# Altium PCB 20bit_40MS_ADC_DIOT.PcbDoc (part 1 of 8)
Units mm, origin at the board's own origin, x right, y up, seen from the top; angles counter-clockwise.
Board outline 222.63 x 100.1 mm, 6 copper layers (L1, L2, L3, L4, L5, L6), stack 2.522 mm thick; 616 components, 374 nets, 2097 pads, 984 vias.
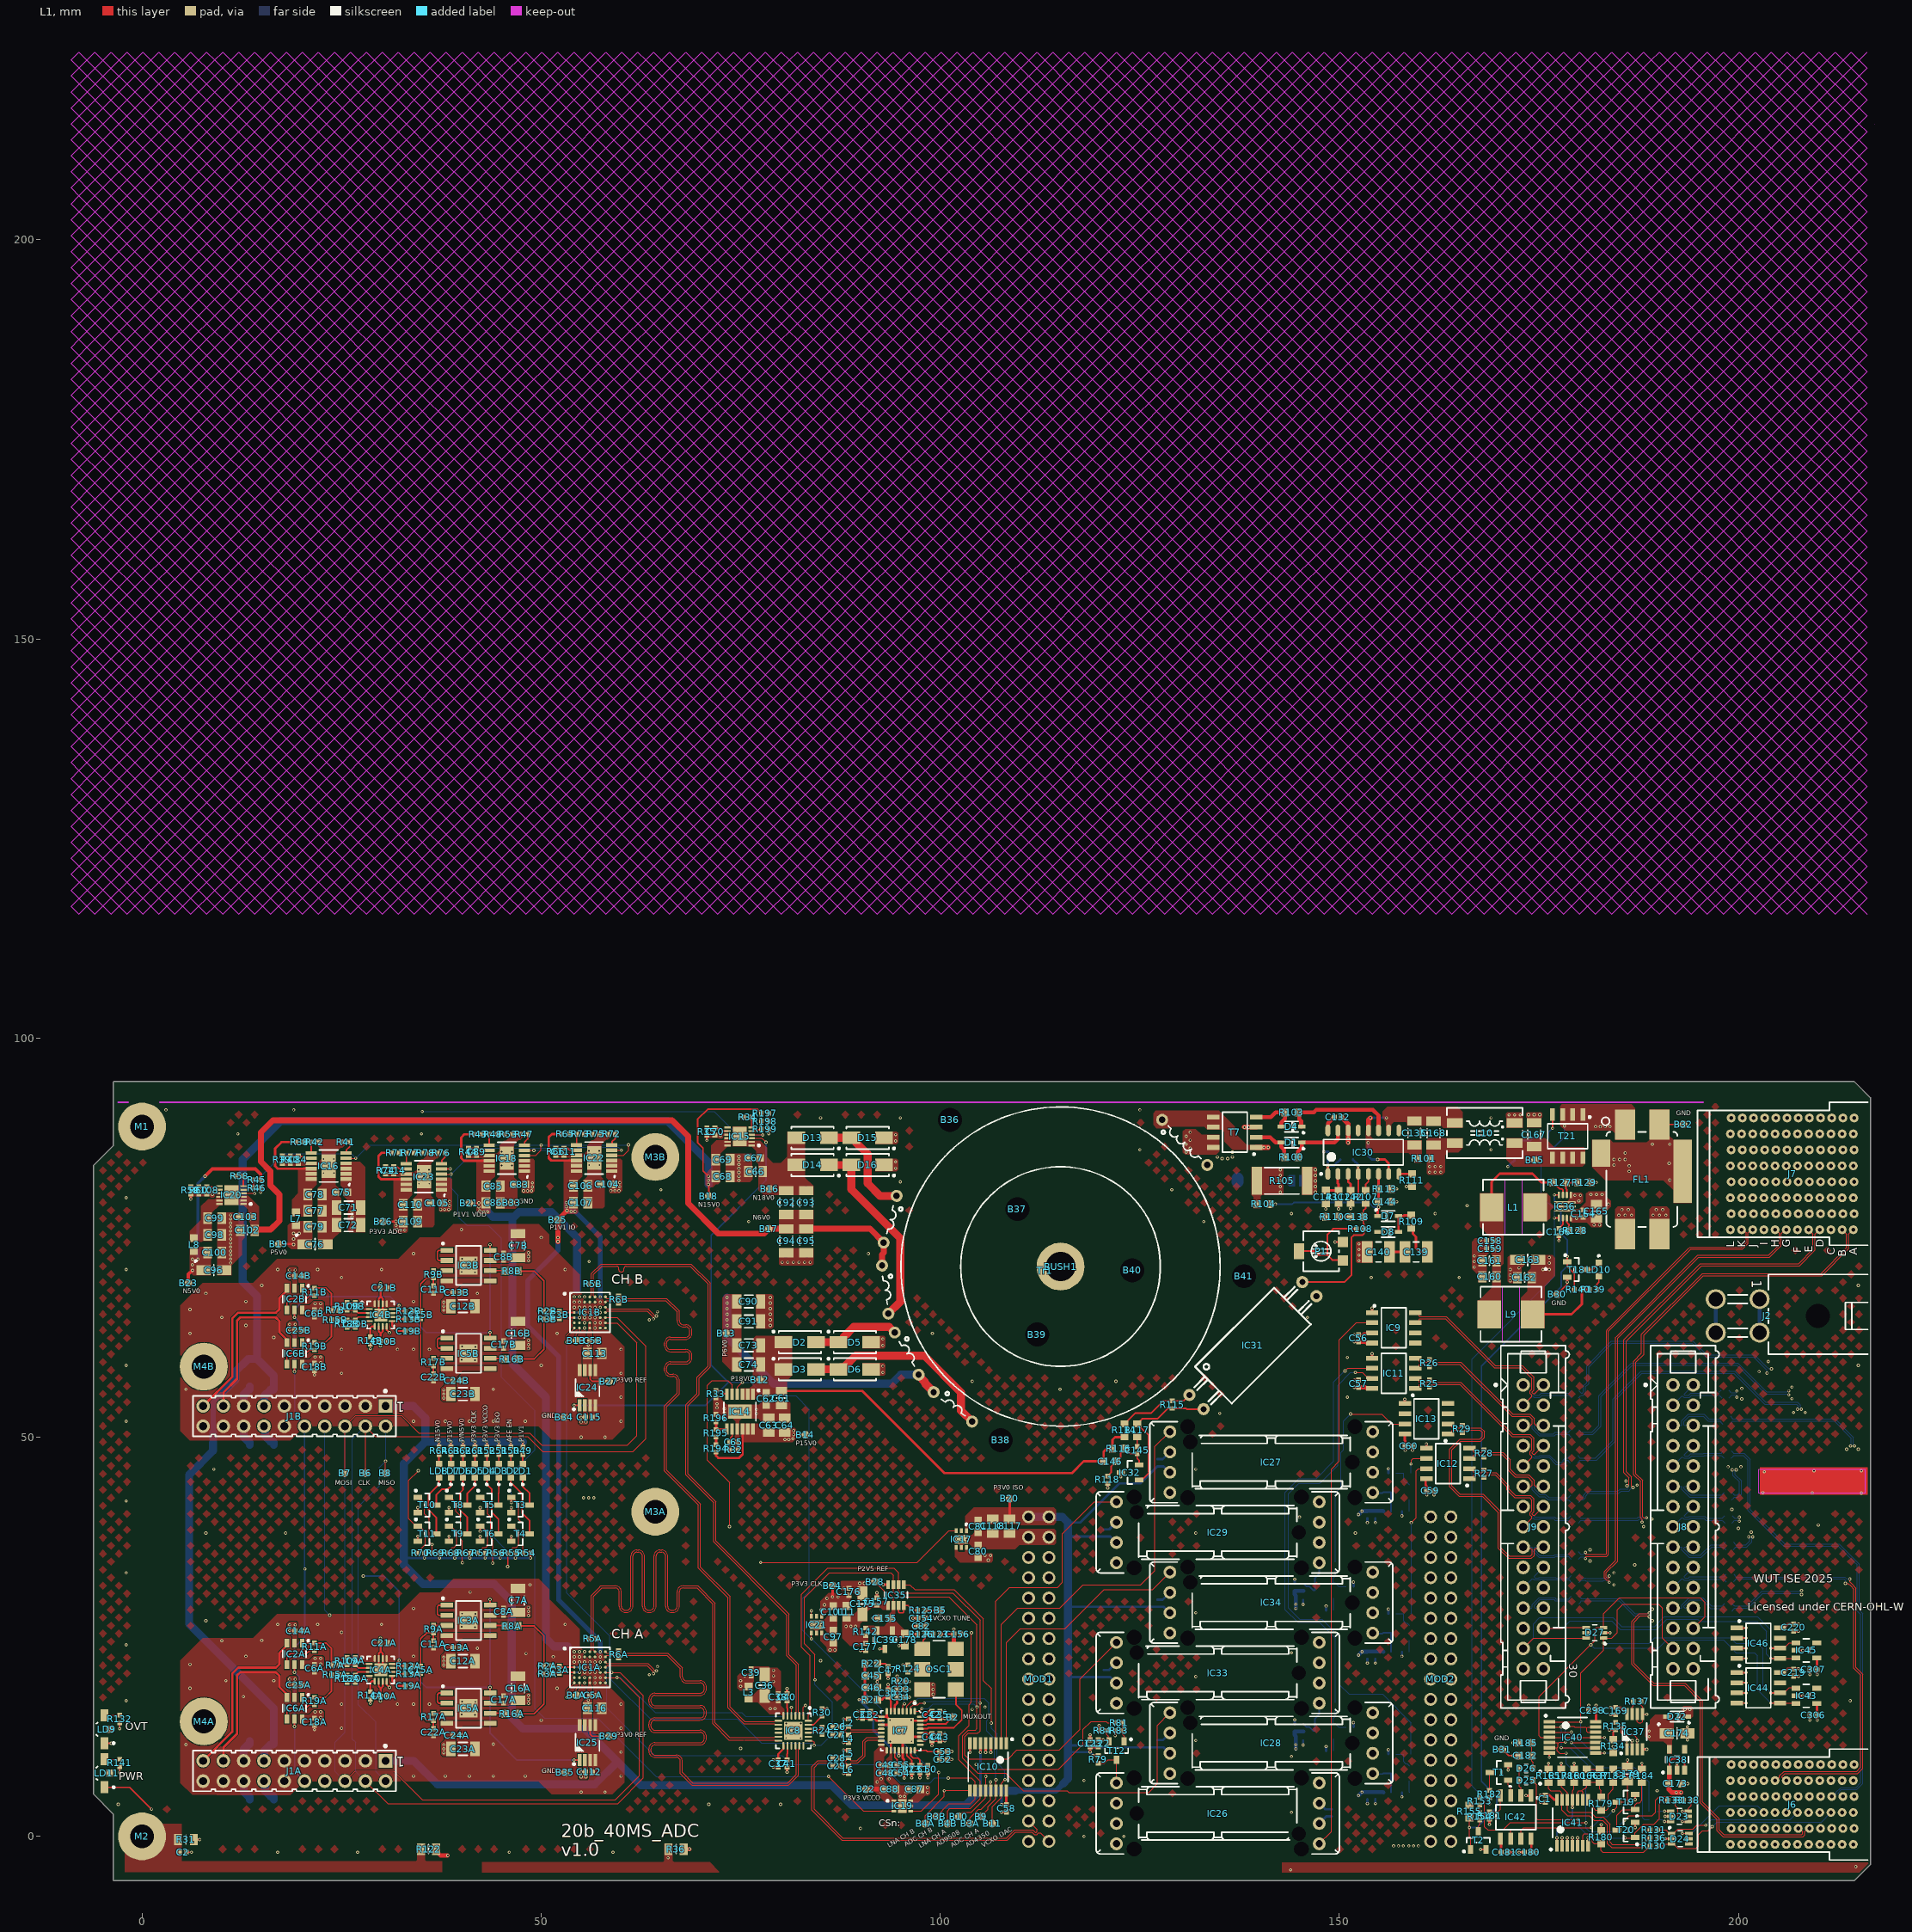
[diagram p0: L1 view]
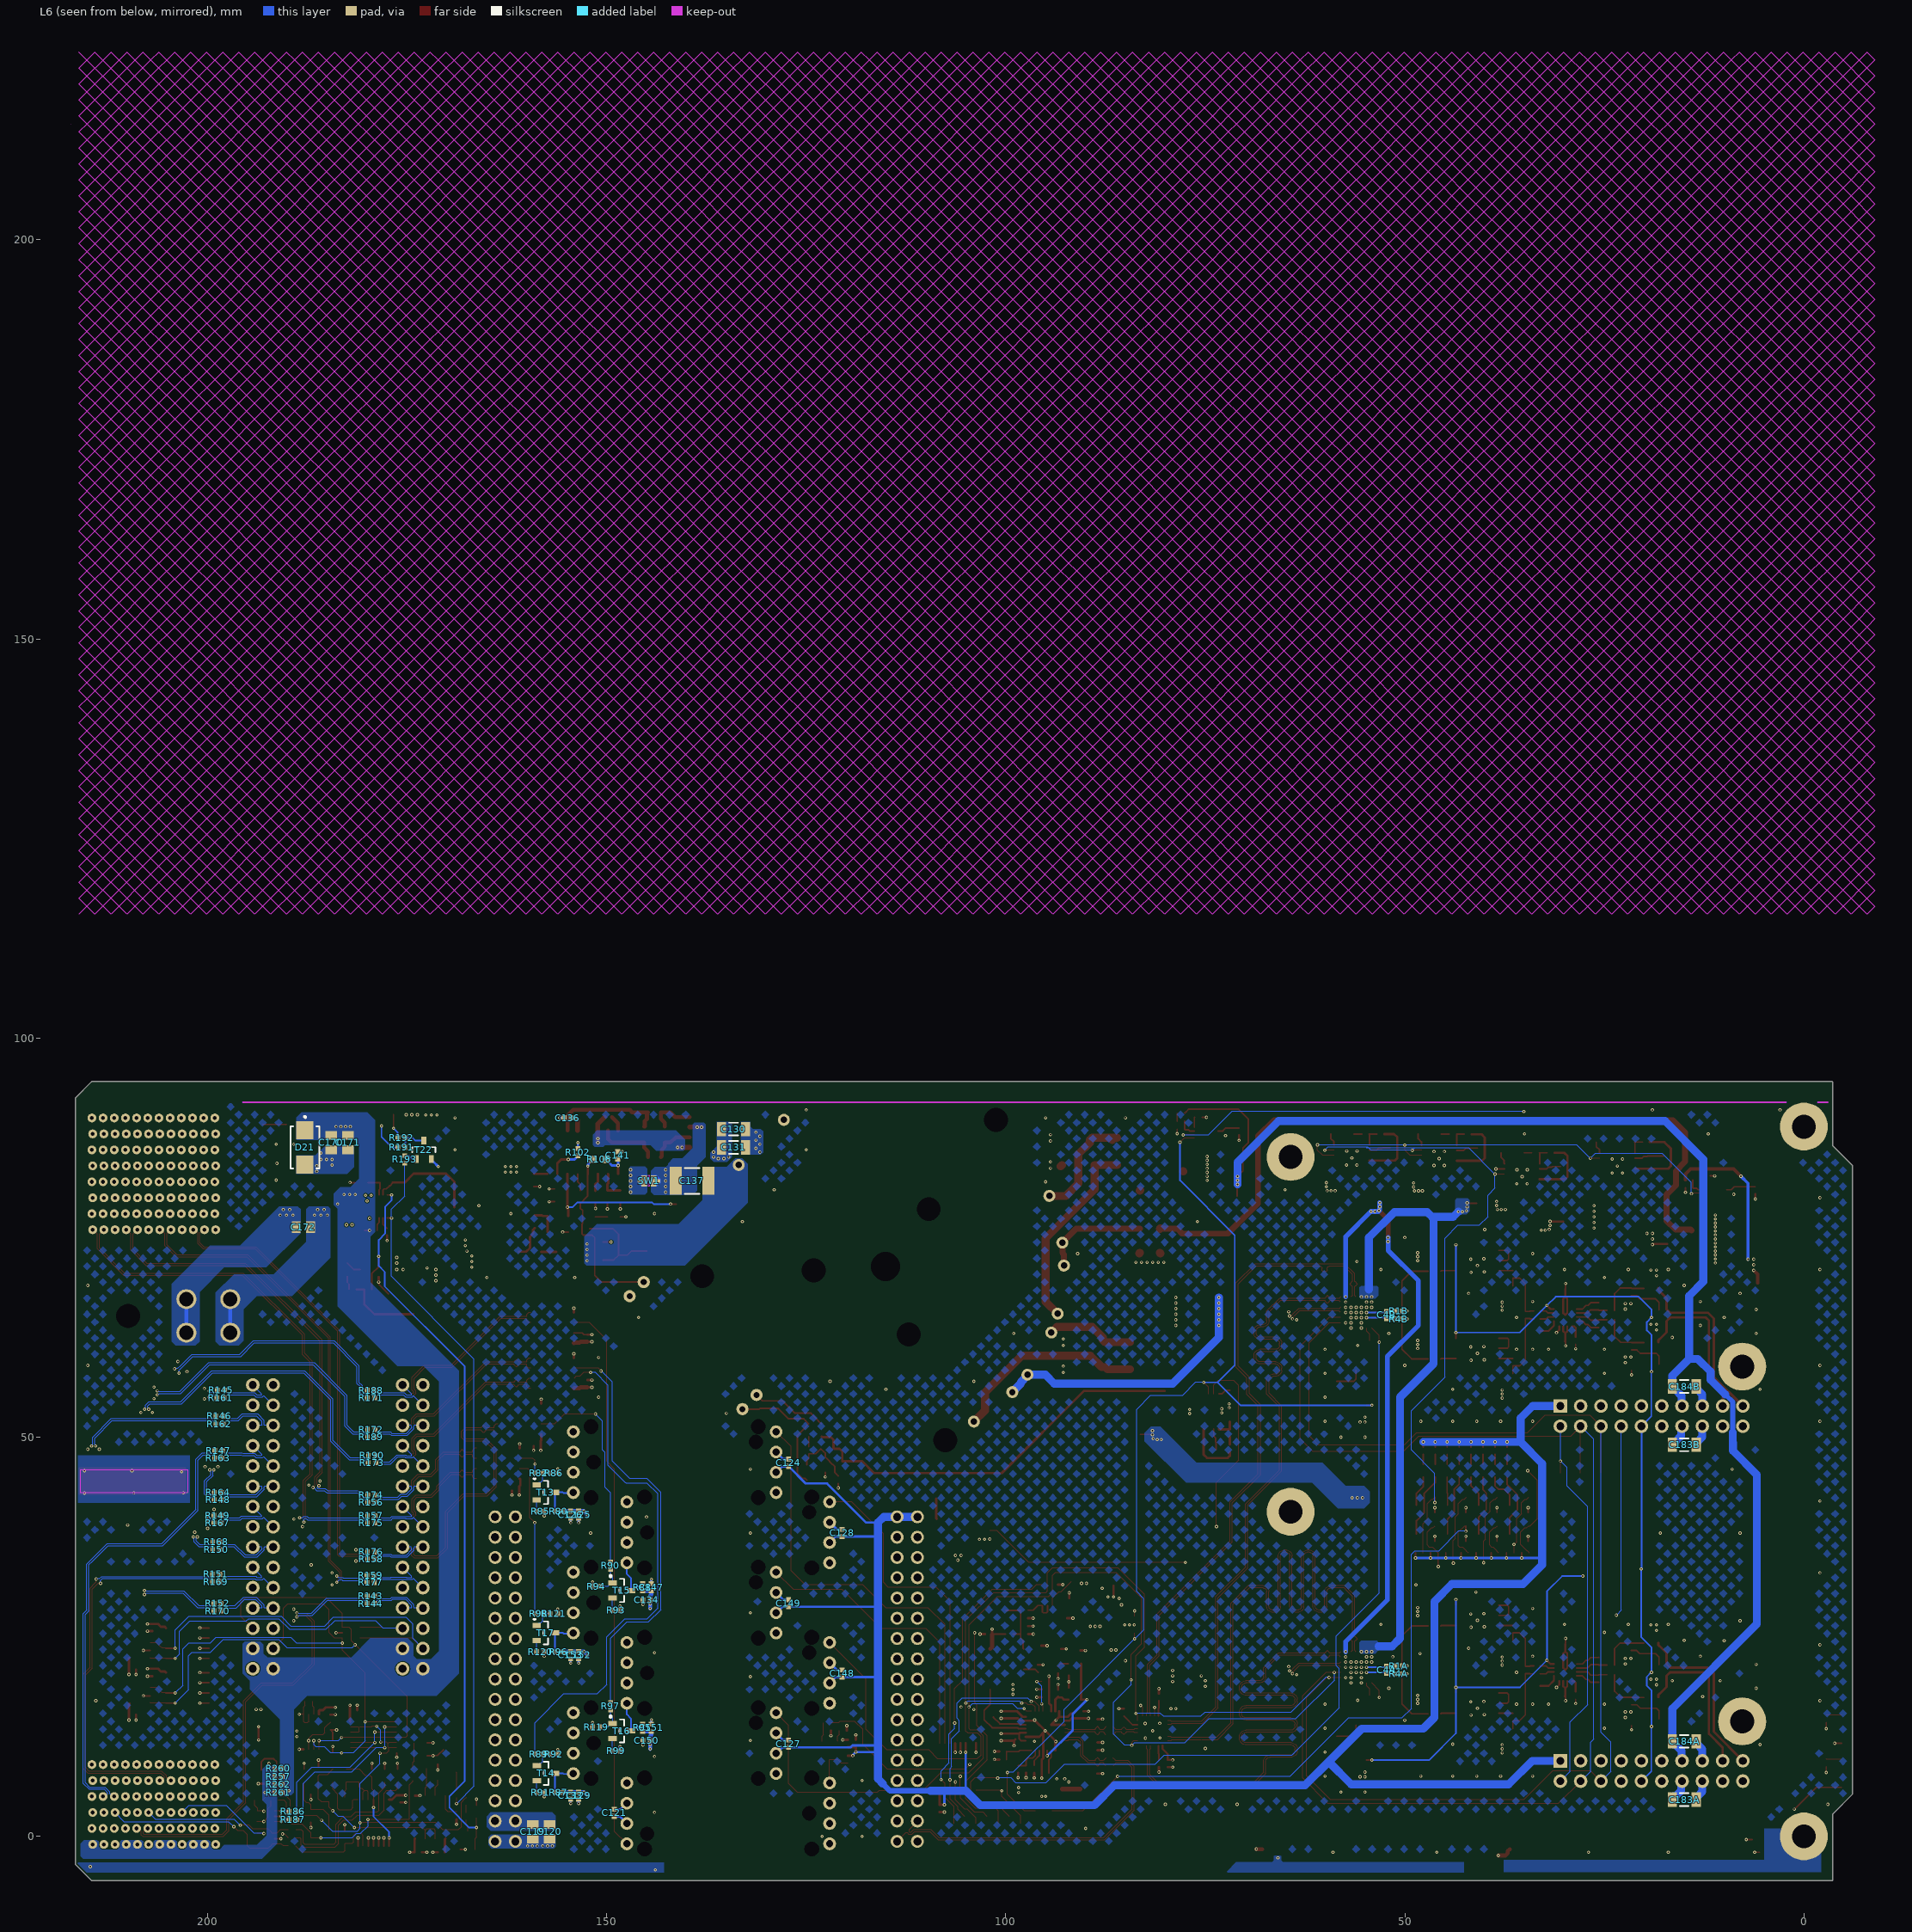
[diagram p1: L6 view, seen from below]
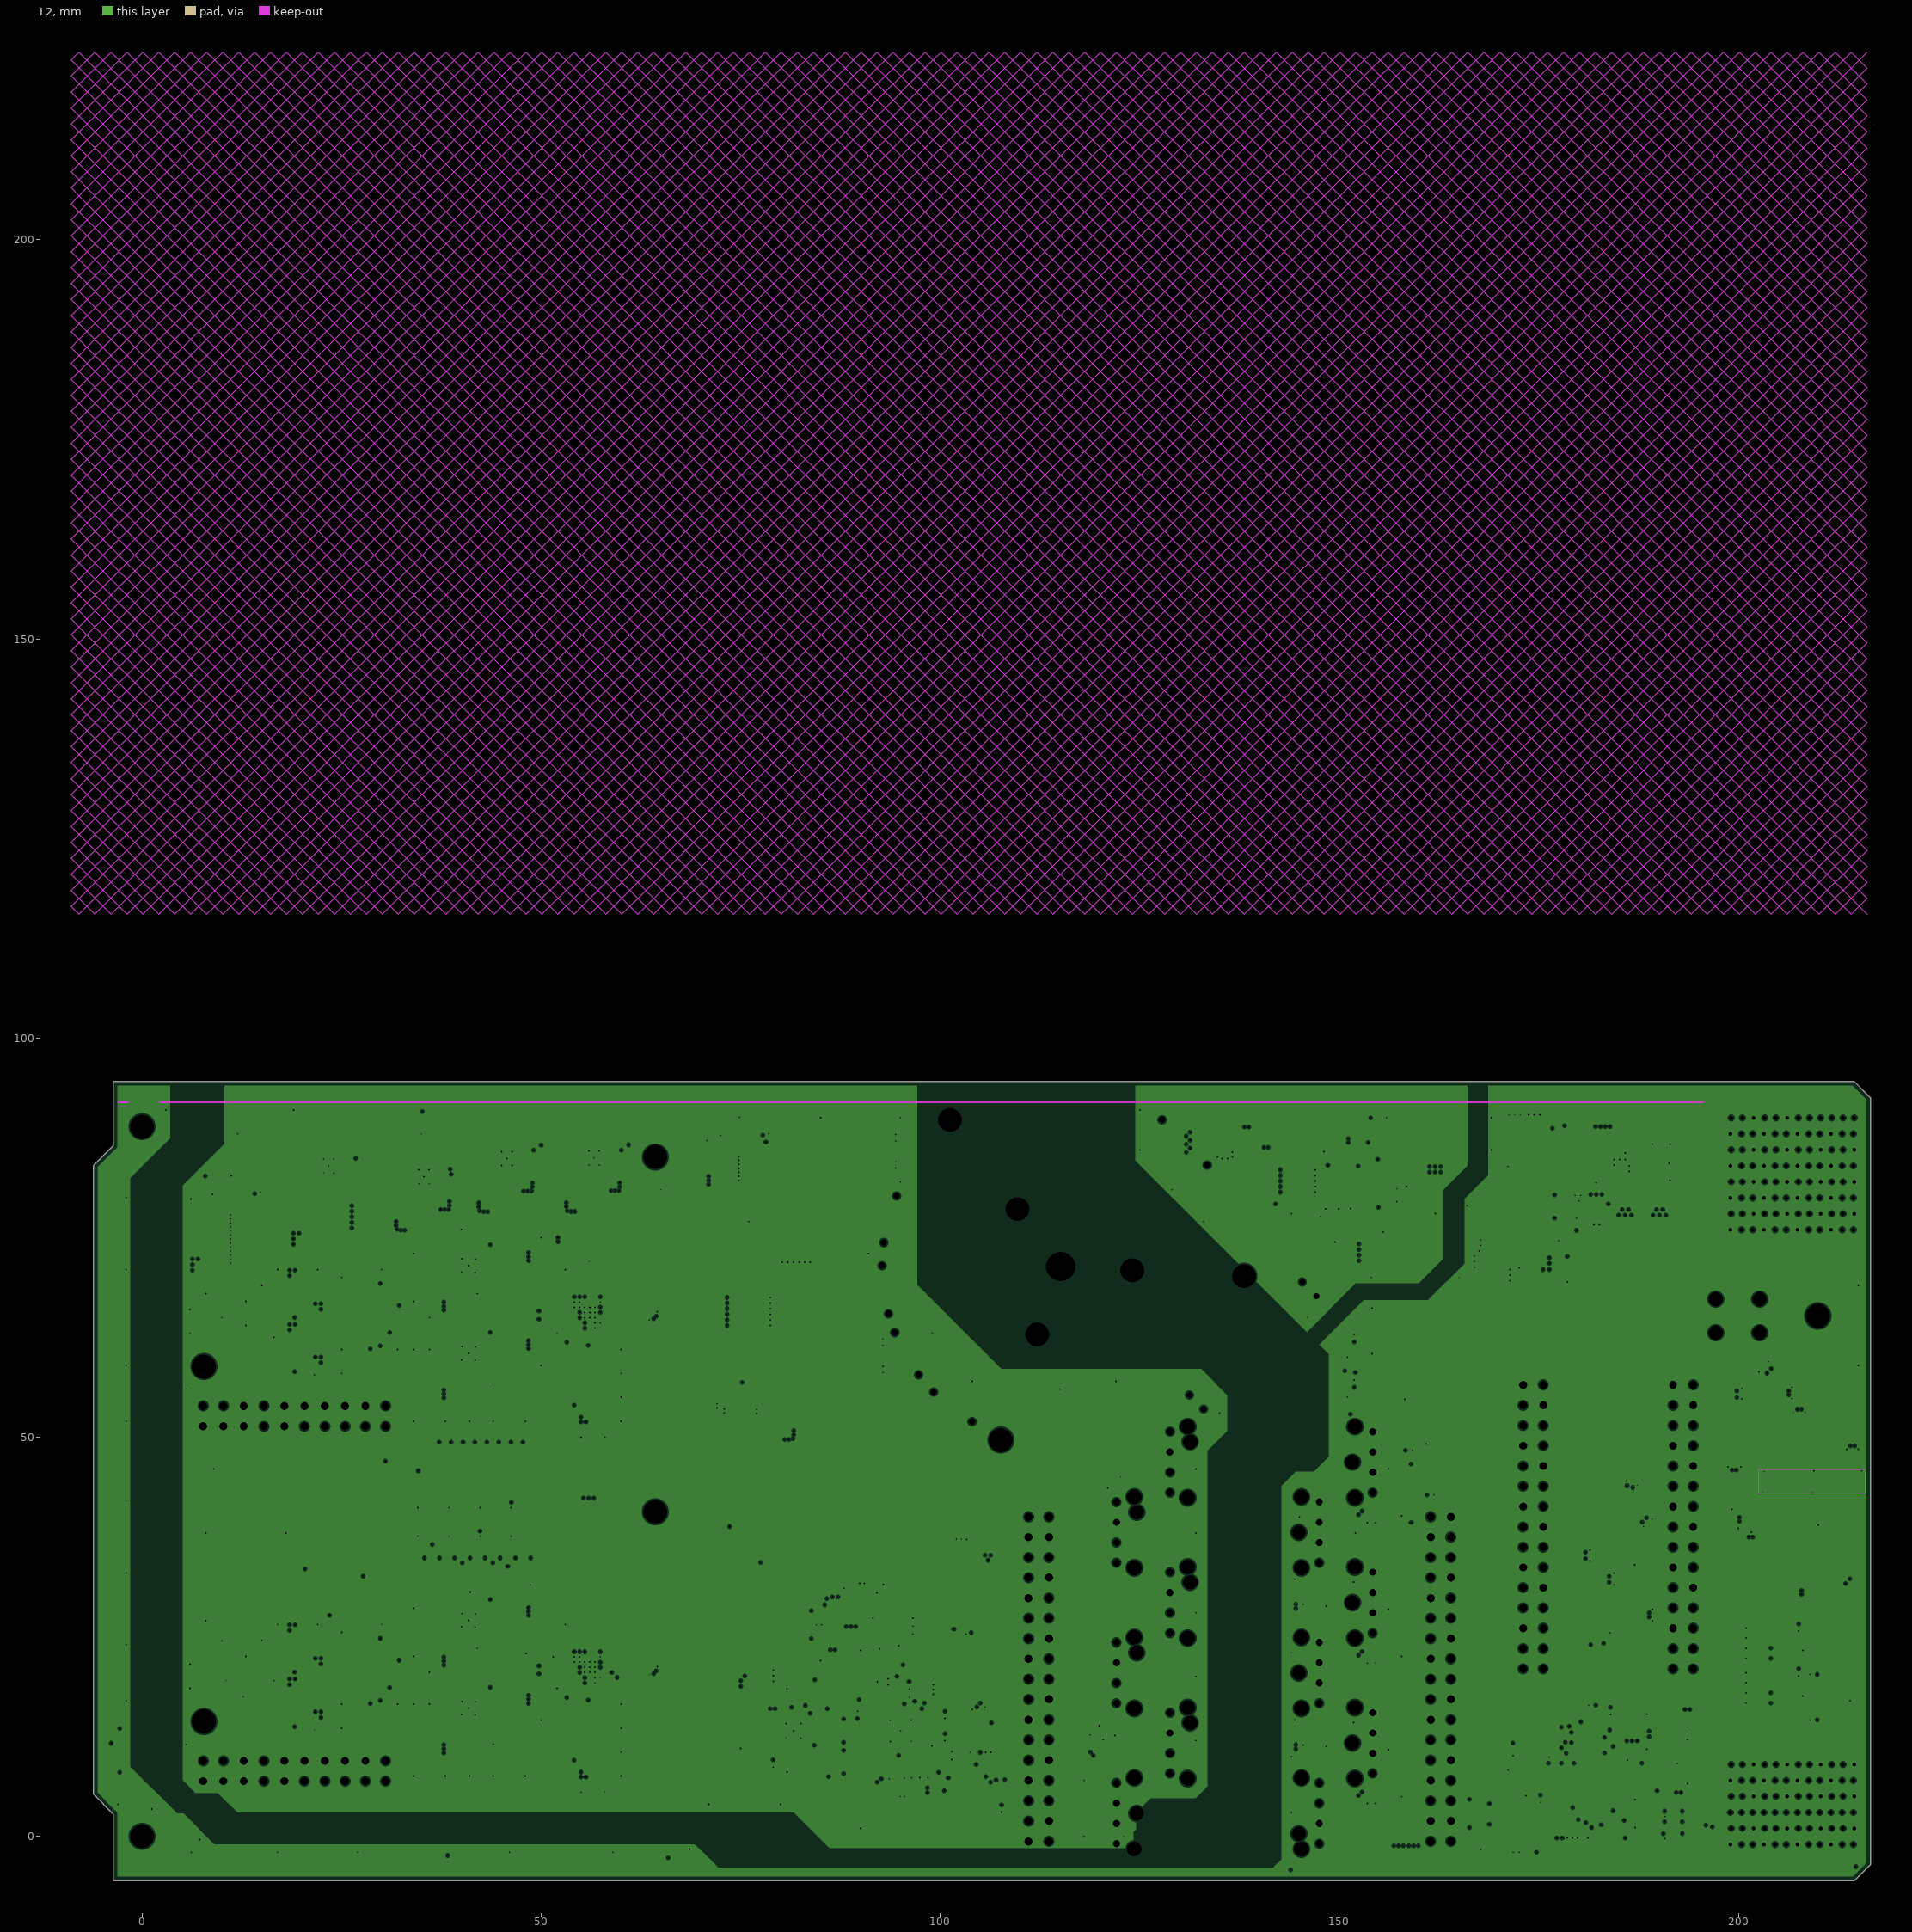
[diagram p2: L2, clearances drawn from the general rule]
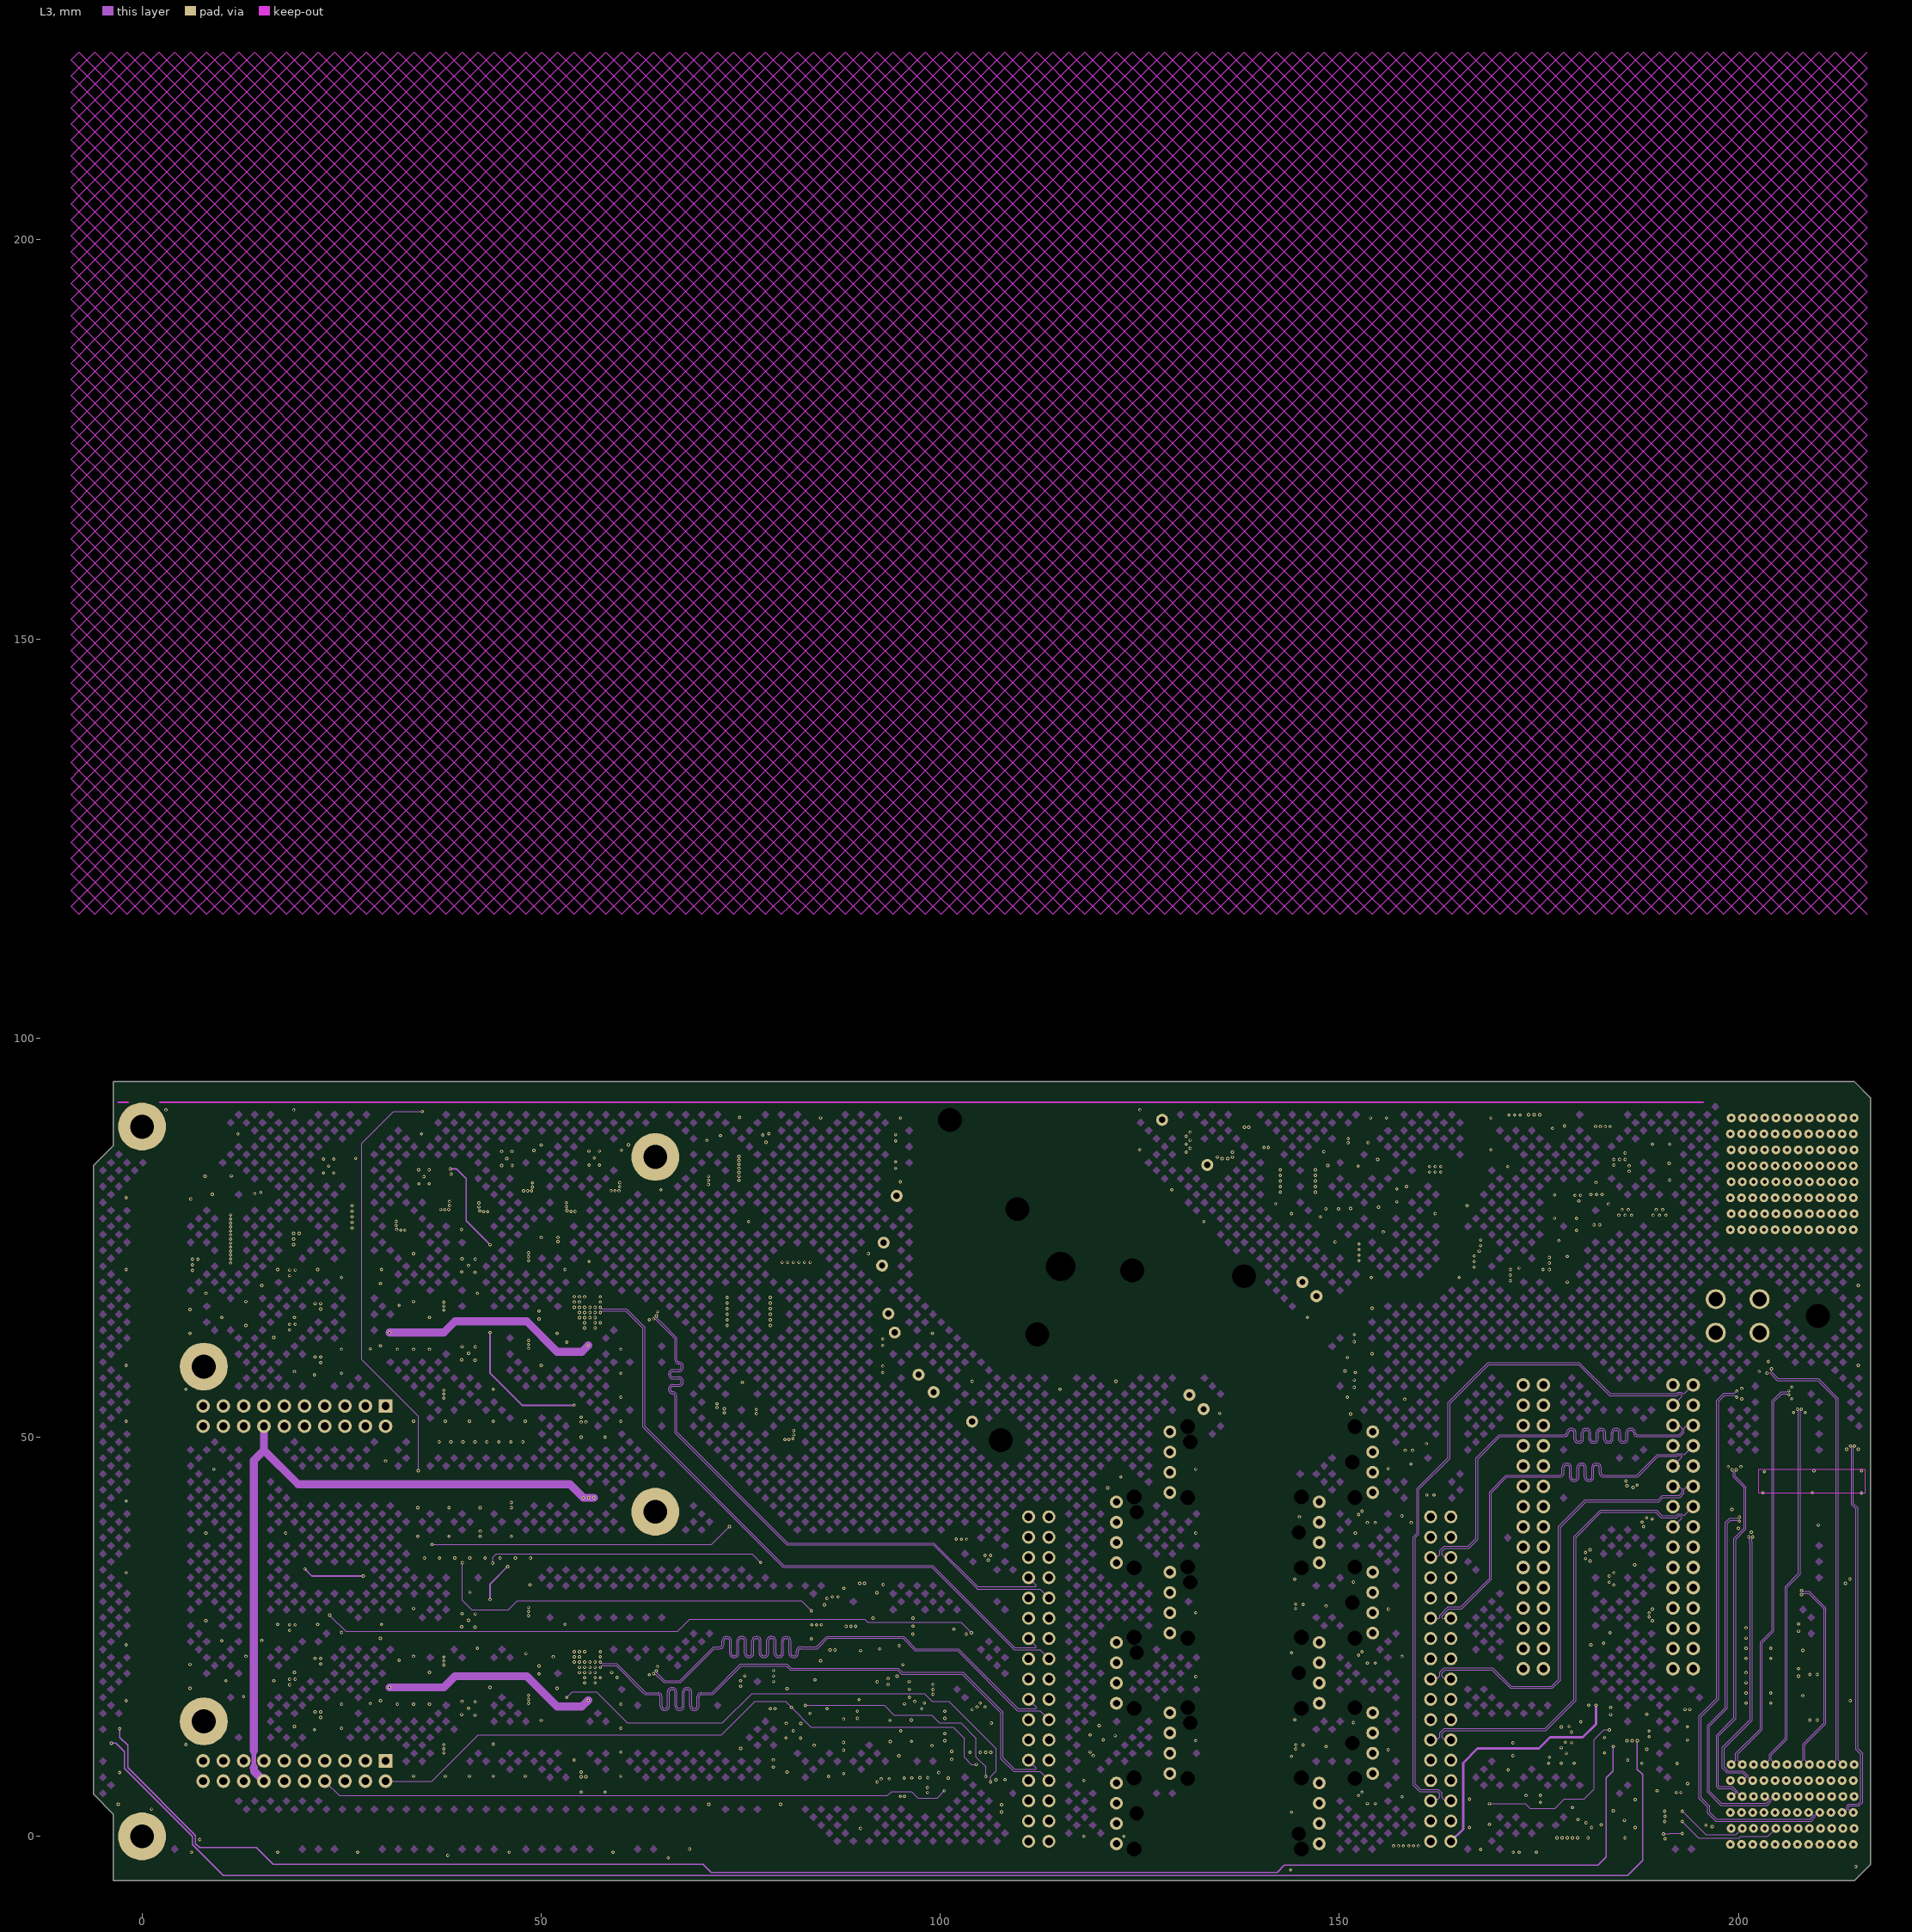
[diagram p3: L3]
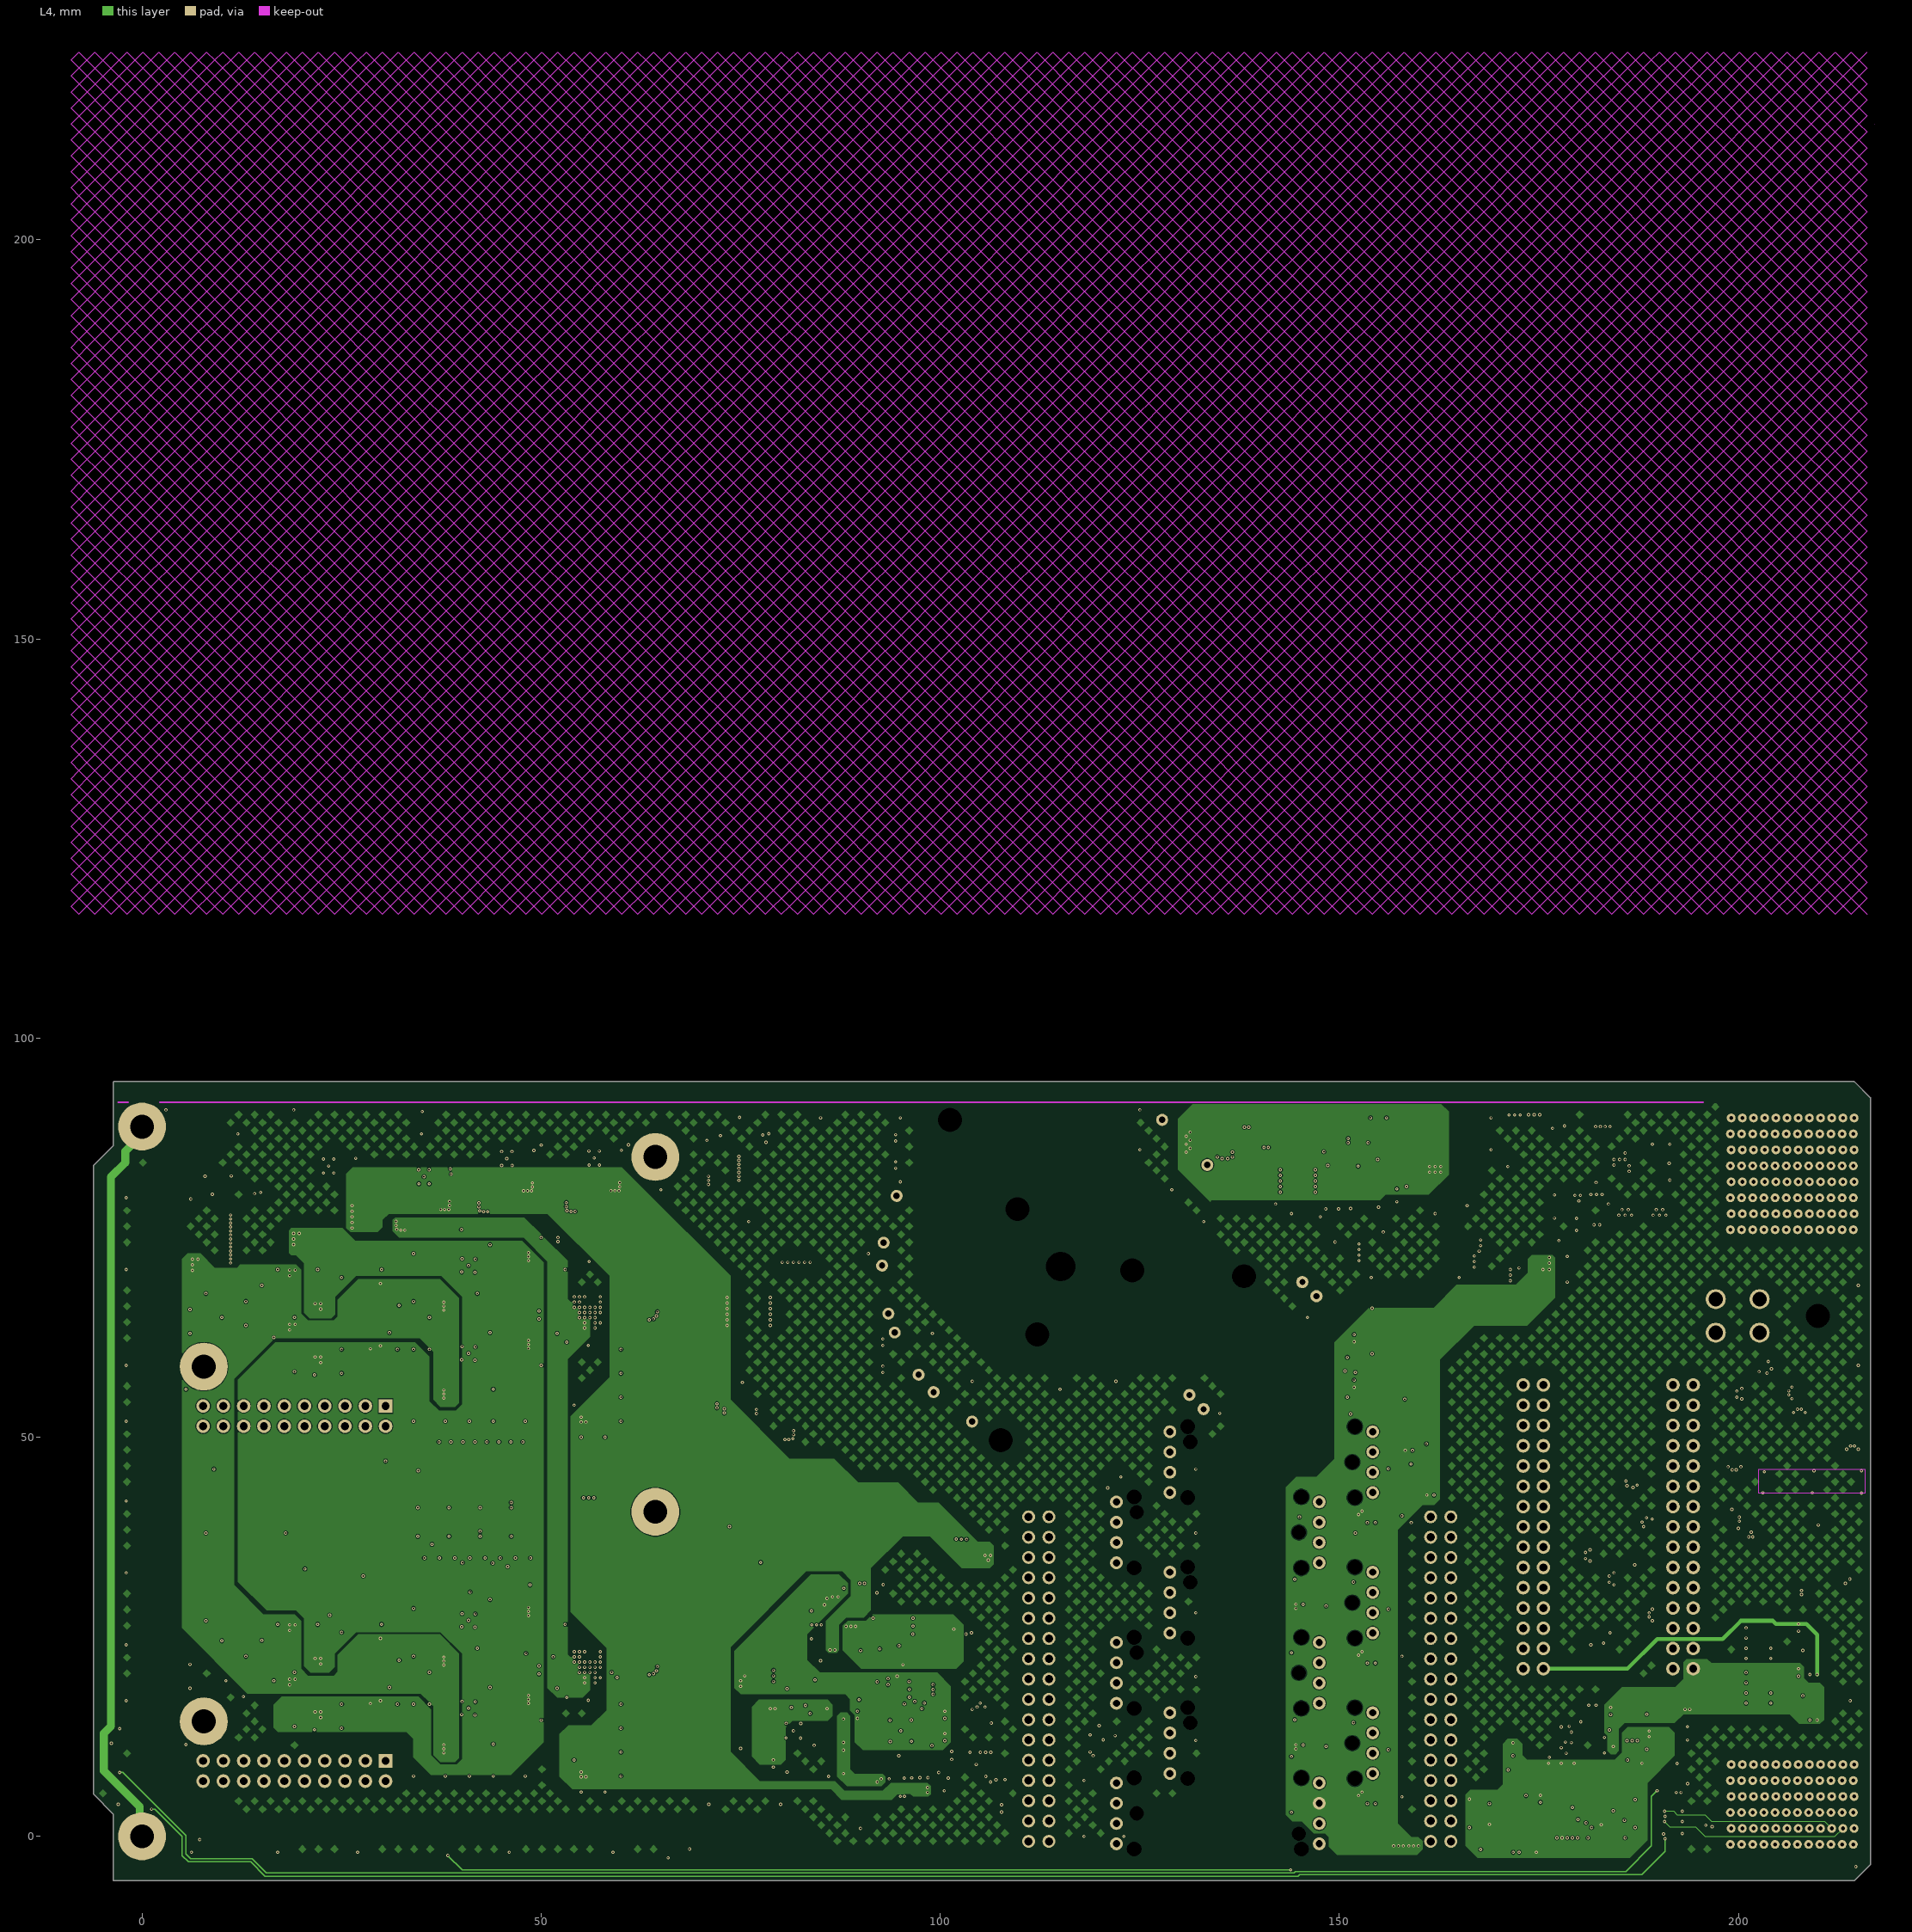
[diagram p4: L4]
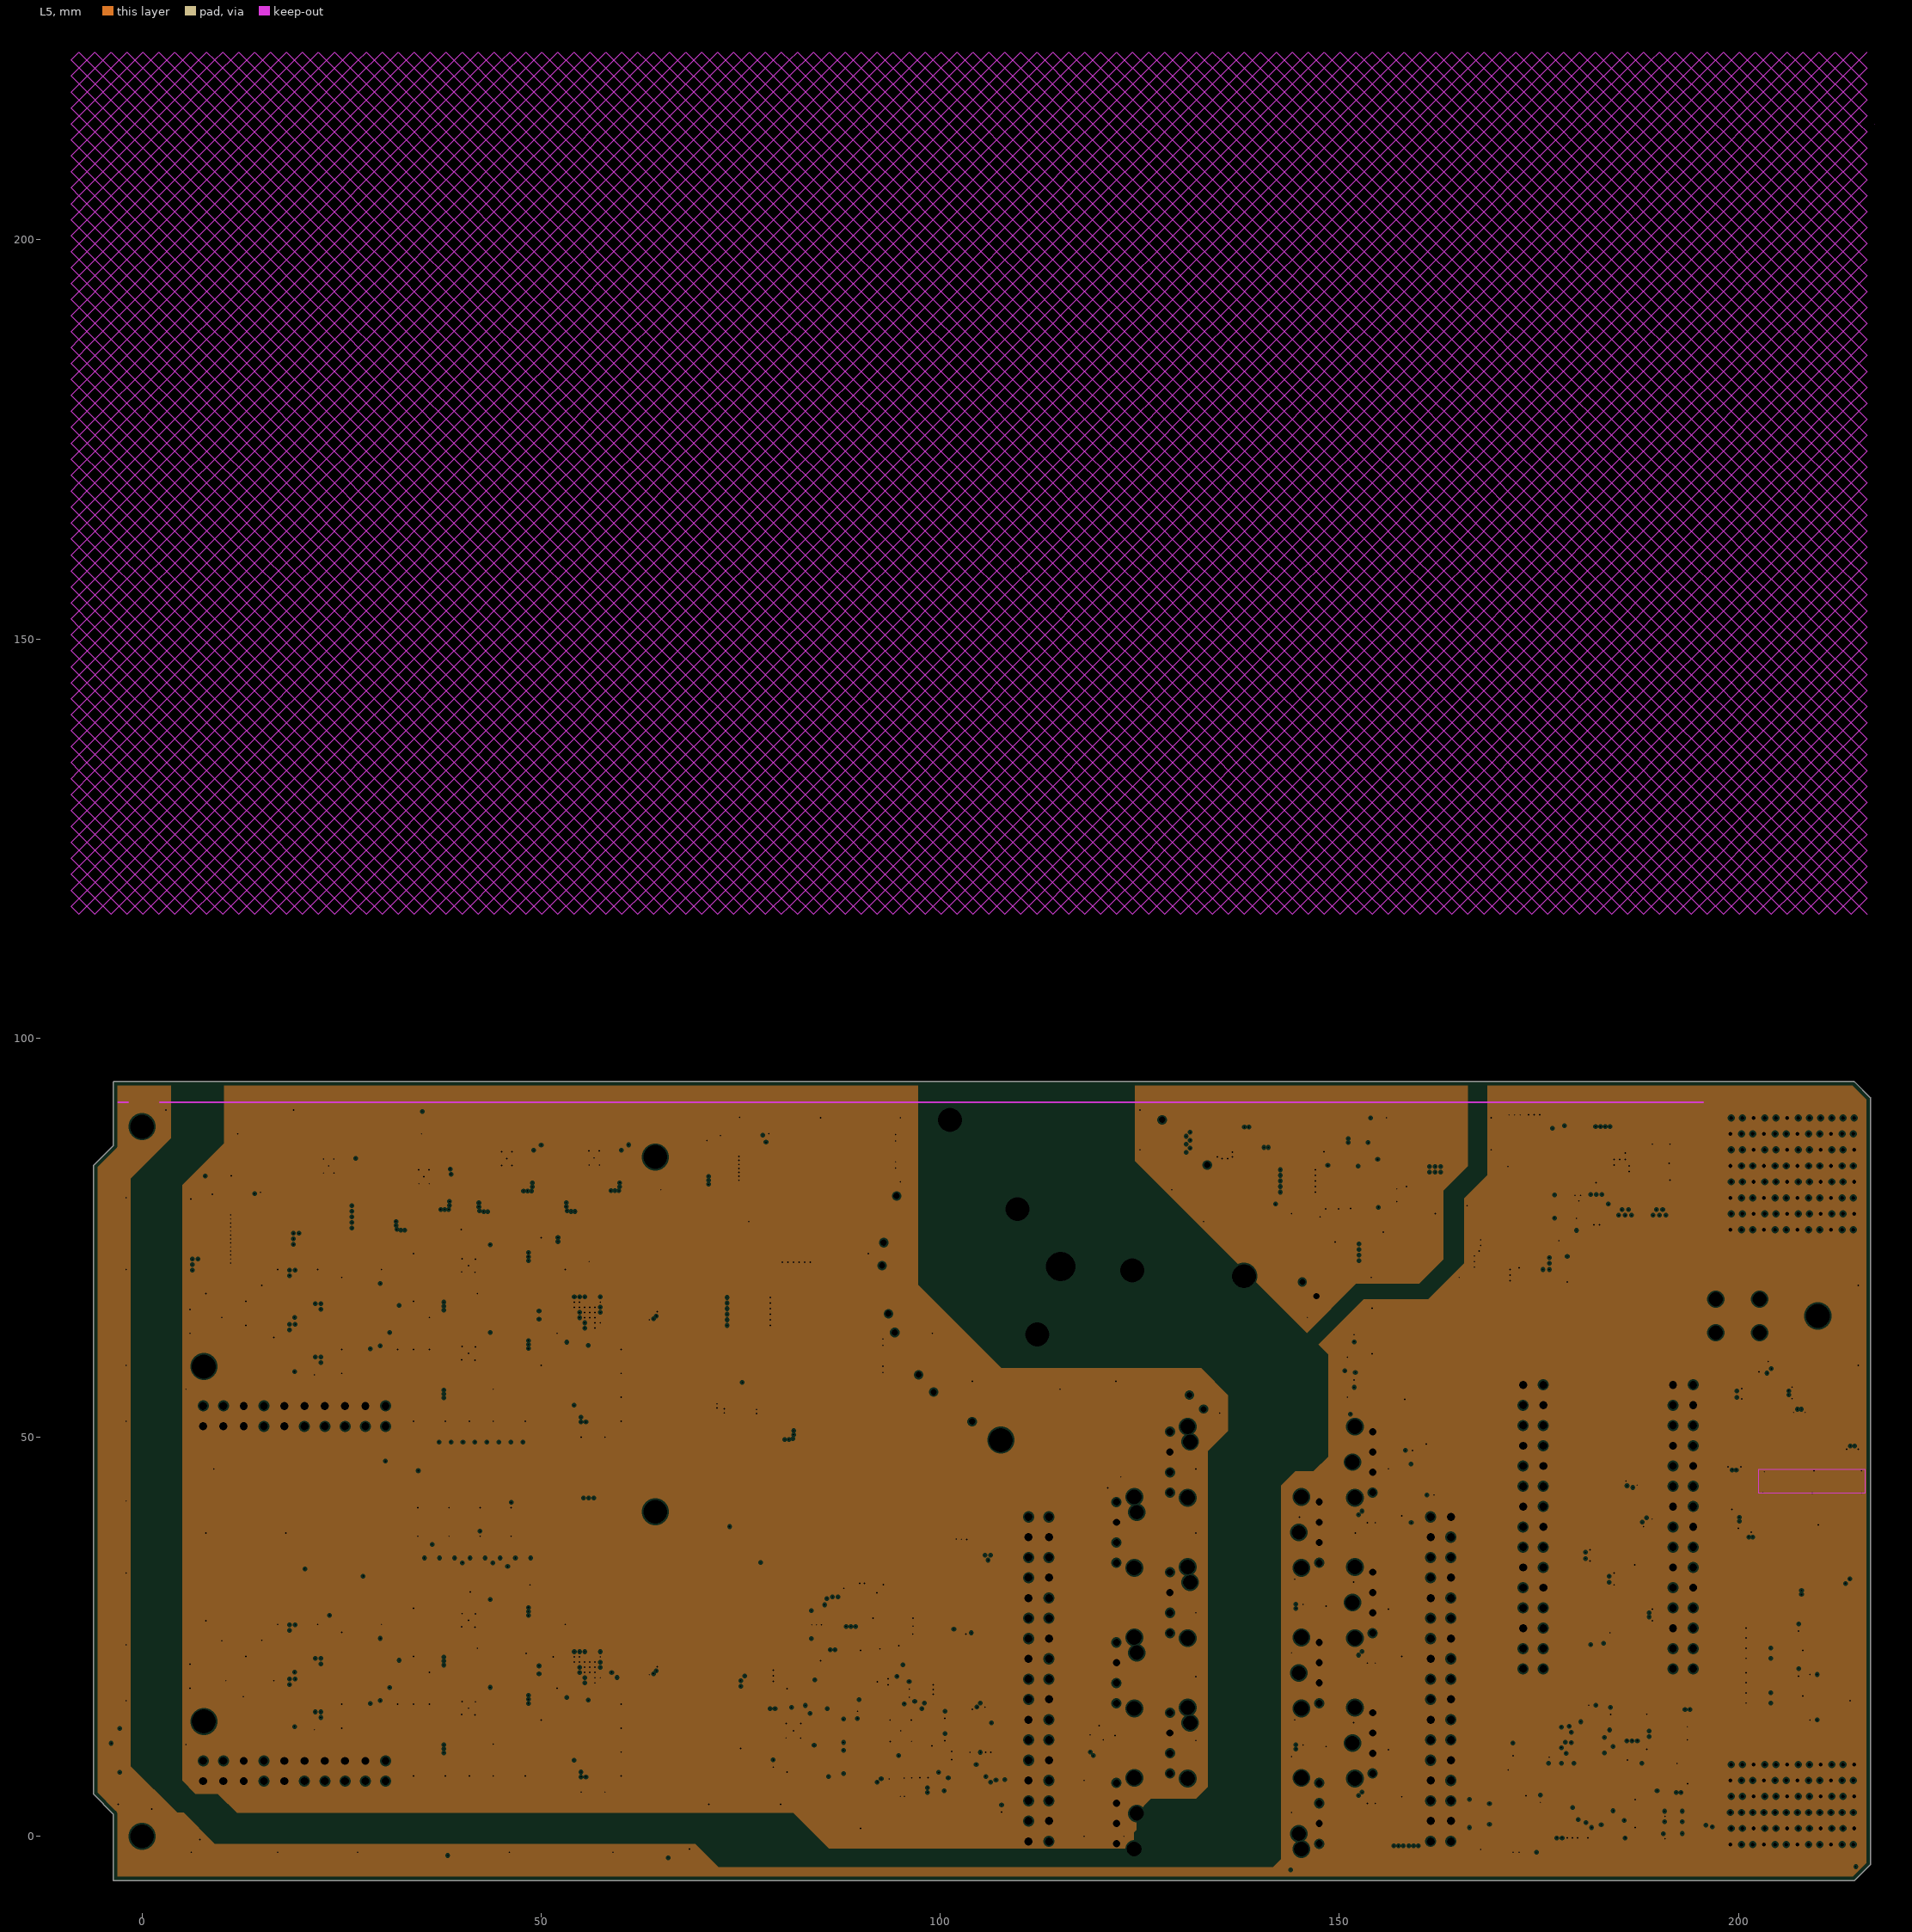
[diagram p5: L5, clearances drawn from the general rule]
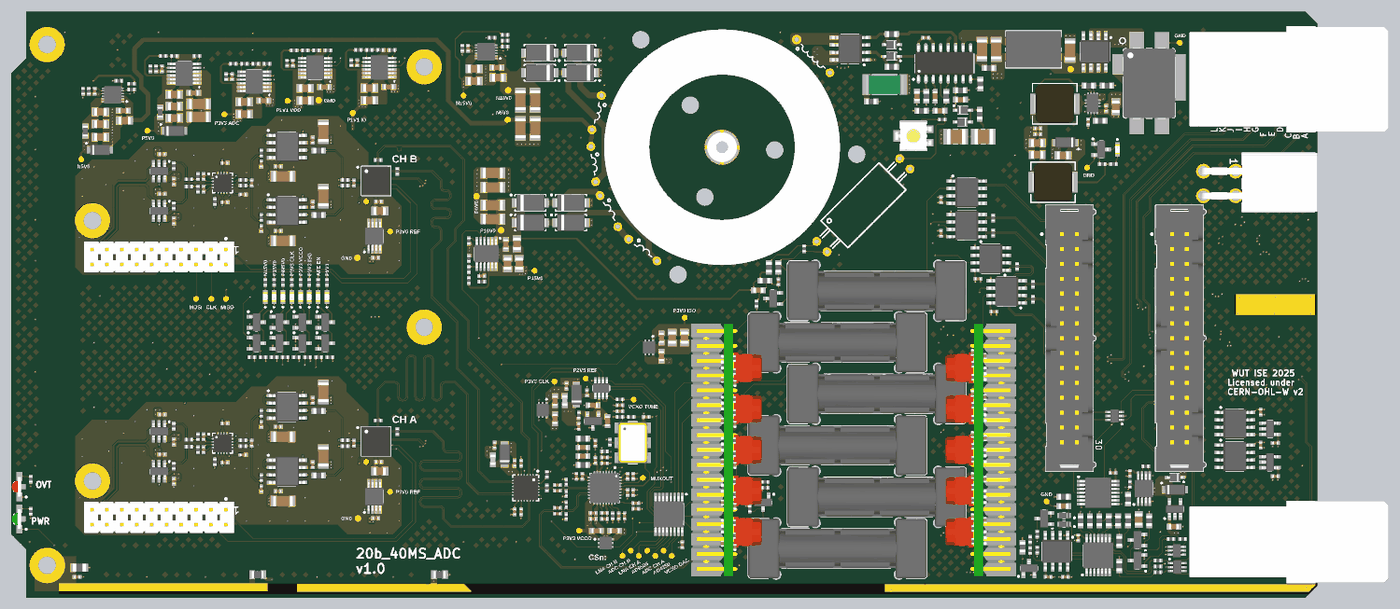
[diagram p11: 3D render of the assembled board from above, using the file's embedded part models]
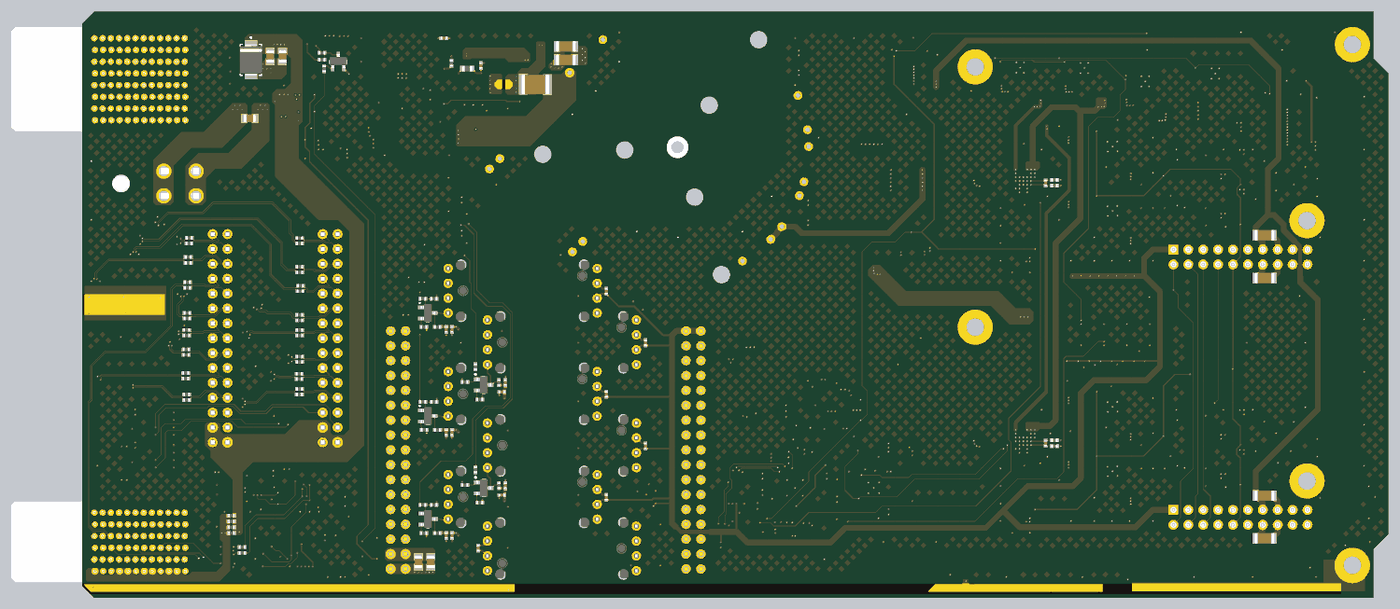
[diagram p12: 3D render of the assembled board from below, using the file's embedded part models]

## Layer stack, top to bottom
Top Solder: solder mask 0.0102, Solder Resist, Dk 3.5
L1: signal copper 0.035
Dielectric 1: prepreg 0.0994, PP-006, Dk 4.1
L2: plane copper 0.0152, net (Multiple Nets)
Dielectric 2: core 0.55, PP-006, Dk 4.1
L3: signal copper 0.0175
Dielectric 3: dielectric 1.088, FR-4, Dk 4.41
L4: signal copper 0.0175
Dielectric 4: core 0.55, PP-006, Dk 4.1
L5: plane copper 0.0152, net (Multiple Nets)
Dielectric 5: prepreg 0.0994, PP-006, Dk 4.1
L6: signal copper 0.035
Bottom Solder: solder mask 0.0102, Solder Resist, Dk 3.5

## Board outline
-6.096,5.309 -6.096,17.134 -6.096,83.999 -6.081,84.035 -3.606,86.509 -3.606,94.488 -3.556,94.539 214.483,94.539 214.519,94.524 216.518,92.524 216.533,92.488 216.533,-3.512 216.518,-3.548 214.519,-5.547 214.483,-5.562 89.258,-5.562 89.253,-5.562 71.444,-5.562 71.44,-5.562 -3.556,-5.562 -3.606,-5.512 -3.606,2.787

## Design rules (kind name [scope] priority, off if disabled: settings)
BoardOutlineClearance [All] p1: gap=0.254 ignorepadtopadclearanceinfootprint=FALSE except(0: Arc-SplitContinuation Track-SplitContinuation SMDPad-SplitContinuation THPad-SplitContinuation Via-SplitContinuation Fill-SplitContinuation Poly-SplitContinuation Region-SplitContinuation Text-SplitContinuation)
Clearance Clearance_balance_to_keepout [InNamedPolygon('BALANCE') vs OnLayer('Keep-Out Layer')] p1: gap=0.3 ignorepadtopadclearanceinfootprint=FALSE
Clearance Clearance_balance_to_all [InNamedPolygon('BALANCE')] p2: gap=1 ignorepadtopadclearanceinfootprint=FALSE
Clearance [All] p3: gap=0.1 ignorepadtopadclearanceinfootprint=FALSE except(0: Arc-Region Track-Region SMDPad-Region THPad-Region Via-Region Fill-Region Poly-Region Region-Region Region-Text Region-Hole)
DiffPairsRouting [InNetClass('D100')] p1: maxlimit=0.149 minlimit=0.119 mostfreqgap=0.149 toplayer_mingap=0.149 toplayer_minwidth=0.125 toplayer_maxwidth=0.125 toplayer_prefwidth=0.125 midlayer1_maxgap=0.119 midlayer1_prefgap=0.119 midlayer1_minwidth=0.13 midlayer1_maxwidth=0.13 midlayer1_prefwidth=0.13 midlayer2_maxgap=0.119 midlayer2_prefgap=0.119 midlayer2_minwidth=0.13 midlayer2_maxwidth=0.13 midlayer2_prefwidth=0.13 bottomlayer_mingap=0.149 bottomlayer_minwidth=0.125 bottomlayer_maxwidth=0.125 bottomlayer_prefwidth=0.125 impedanceprofiledriven=TRUE impedanceprofileid={4015225C-B1AD-48AB-8084-DC43C2481BCE} impedanceprofilevalue=100.000000 maxuncoupledlength=12.7
HoleSize [All] p1: absolutevalues=TRUE maxlimit=5 minlimit=0.025 maxpercent=80.000 minpercent=20.000
HoleToHoleClearance [not (InComponent('IC26') OR InComponent('IC27') OR InComponent('IC28') OR InComponent('IC29') OR InComponent('IC33') OR InComponent('IC34'))] p1: gap=0.254 allowstackedmicrovias=TRUE
MatchedLengths MatchedLengths_INTER_ADC [InNetClass('ADC_DATA')] p1: tolerance=25.4 checknetsindiffpair=FALSE checkdiffpairvsdiffpair=TRUE checkxsignals=TRUE checkothers=TRUE usedelayunits=TRUE delaytolerance=50.000000
MatchedLengths MatchedLengths_INTER_CLK [InNetClass('ADC_CLK')] p2: tolerance=25.4 checknetsindiffpair=FALSE checkdiffpairvsdiffpair=TRUE checkxsignals=TRUE checkothers=TRUE usedelayunits=TRUE delaytolerance=50.000000
MatchedLengths MatchedLengths_INTER_LVDS [InNetClass('ADC_LVDS')] p3: tolerance=25.4 checknetsindiffpair=FALSE checkdiffpairvsdiffpair=TRUE checkxsignals=TRUE checkothers=TRUE usedelayunits=TRUE delaytolerance=50.000000
MatchedLengths MatchedLengths_INTRA_ADC [InNetClass('ADC_DATA')] p4: tolerance=25.4 checknetsindiffpair=TRUE checkdiffpairvsdiffpair=FALSE checkxsignals=FALSE checkothers=FALSE usedelayunits=TRUE delaytolerance=5.000000
MatchedLengths MatchedLengths_INTRA_CLK [InNetClass('ADC_CLK')] p5: tolerance=25.4 checknetsindiffpair=TRUE checkdiffpairvsdiffpair=FALSE checkxsignals=FALSE checkothers=FALSE usedelayunits=TRUE delaytolerance=5.000000
MatchedLengths MatchedLengths_INTRA_LVDS [InNetClass('ADC_LVDS')] p6: tolerance=25.4 checknetsindiffpair=TRUE checkdiffpairvsdiffpair=FALSE checkxsignals=FALSE checkothers=FALSE usedelayunits=TRUE delaytolerance=5.000000
MinimumSolderMaskSliver [All] p1: minsoldermaskwidth=0.1
PlaneClearance [All] p1: clearance=0.2
PlaneConnect [All] p1: pad.planeconnectstyle=Relief pad.reliefexpansion=0.2 pad.reliefentries=4 pad.reliefconductorwidth=0.254 pad.reliefairgap=0.2 via.planeconnectstyle=Direct via.reliefexpansion=0.508 via.reliefentries=4 via.reliefconductorwidth=0.254 via.reliefairgap=0.254
PolygonConnect [All] p1: connectstyle=Direct reliefconductorwidth=0.254 reliefentries=4 polygonreliefangle="90 Angle" airgapwidth=0.254
RoutingVias [All] p1: holewidth=0.2 width=0.4 viastyle="Through Hole" minholewidth=0.2 minwidth=0.4 maxholewidth=0.711 maxwidth=1.27
SilkToSolderMaskClearance [IsPad] p1: minsilkscreentomaskgap=0.15 clearancetoexposedcopper=TRUE
SolderMaskExpansion [All] p1: expansion=0.05 istentingtop=FALSE
SupplyNets "Schematic Supply Nets_3" [InNet('P3V3_ISO')] p1: voltage=0.000
SupplyNets "Schematic Supply Nets_22" [InNet('P3V3_DAC')] p2: voltage=0.000
SupplyNets "Schematic Supply Nets_21" [InNet('P12V0_LLC')] p3: voltage=0.000
SupplyNets "Schematic Supply Nets_19" [InNet('P2V5_VREF')] p4: voltage=0.000
SupplyNets "Schematic Supply Nets_17" [InNet('P3V3')] p5: voltage=0.000
SupplyNets "Schematic Supply Nets_16" [InNet('GND_LLC')] p6: voltage=0.000
SupplyNets "Schematic Supply Nets_15" [InNet('STRIP1')] p7: voltage=0.000
SupplyNets "Schematic Supply Nets_14" [InNet('P3V0_REFB')] p8: voltage=0.000
SupplyNets "Schematic Supply Nets_13" [InNet('P12V0_EEM')] p9: voltage=0.000
SupplyNets "Schematic Supply Nets_12" [InNet('P3V0_REFA')] p10: voltage=0.000
SupplyNets "Schematic Supply Nets_7" [InNet('P3V3_MP')] p11: voltage=0.000
SupplyNets "Schematic Supply Nets_2" [InNet('P3V3_MP2')] p12: voltage=0.000
SupplyNets "Schematic Supply Nets_10" [InNet('P3V3_VCCO')] p13: voltage=0.000
SupplyNets "Schematic Supply Nets" [InNet('P5V0')] p14: voltage=0.000
SupplyNets "Schematic Supply Nets_43" [InNet('N15V0')] p15: voltage=0.000
SupplyNets "Schematic Supply Nets_41" [InNet('P18V0')] p16: voltage=0.000
SupplyNets "Schematic Supply Nets_40" [InNet('N6V0')] p17: voltage=0.000
SupplyNets "Schematic Supply Nets_39" [InNet('P15V0')] p18: voltage=0.000
SupplyNets "Schematic Supply Nets_36" [InNet('P6V0')] p19: voltage=0.000
SupplyNets "Schematic Supply Nets_34" [InNet('N18V0')] p20: voltage=0.000
SupplyNets "Schematic Supply Nets_32" [InNet('P1V1_VDD')] p21: voltage=0.000
SupplyNets "Schematic Supply Nets_31" [InNet('P3V3_ADC')] p22: voltage=0.000
SupplyNets "Schematic Supply Nets_29" [InNet('P12V0_DIOT')] p23: voltage=0.000
SupplyNets "Schematic Supply Nets_24" [InNet('GND_DIOT')] p24: voltage=0.000
SupplyNets "Schematic Supply Nets_20" [InNet('N5V0')] p25: voltage=0.000
SupplyNets "Schematic Supply Nets_11" [InNet('P3V3_CLK')] p26: voltage=0.000
SupplyNets "Schematic Supply Nets_6" [InNet('P3V3_DIOT')] p27: voltage=0.000
SupplyNets "Schematic Supply Nets_5" [InNet('GND')] p28: voltage=0.000
SupplyNets "Schematic Supply Nets_1" [InNet('P1V1_IO')] p29: voltage=0.000
Width [All] p1: maxlimit=5 minlimit=0.1 preferedwidth=0.1
23 further rules are at their usual default settings.

## Classes and differential pairs
net class ADC_CLK: AD9508_OUT0_N AD9508_OUT0_P AD9508_OUT1_N AD9508_OUT1_P AD9508_OUT2_N AD9508_OUT2_P AD9508_OUT3_N AD9508_OUT3_P
net class ADC_LVDS: EEM_IO.LVDS_N1 EEM_IO.LVDS_N2 EEM_IO.LVDS_N3 EEM_IO.LVDS_N4 EEM_IO.LVDS_P1 EEM_IO.LVDS_P2 EEM_IO.LVDS_P3 EEM_IO.LVDS_P4
net class ADC_DATA: ADC_DAA_N ADC_DAA_P ADC_DAB_N ADC_DAB_P ADC_DBA_N ADC_DBA_P ADC_DBB_N ADC_DBB_P
differential pair class MGT: BP_MGT_Rx BP_MGT_Tx
differential pair class Diff_100Ohm: PE_CLK.CLK
channel class LNA: U_LNAA U_LNAB
channel class AFE: U_AFEA U_AFEB
channel class ADC: U_ADCA U_ADCB
net class SHARED_BUS_[0..4]: SHARED_BUS_0 SHARED_BUS_1 SHARED_BUS_2 SHARED_BUS_3 SHARED_BUS_4
net class PWR: NetC172_2 P12V0_DIOT P12V0_EEM
net class HPOW: P12V0_EEM
net class GA[0..3]: GA0 GA1 GA2 GA3
net class ESD_STRIP: STRIP1 STRIP2 STRIP3
net class EEM_IO.LVDS_P[0..15]: EEM_IO.LVDS_P0 EEM_IO.LVDS_P1 EEM_IO.LVDS_P2 EEM_IO.LVDS_P3 EEM_IO.LVDS_P4 EEM_IO.LVDS_P5 EEM_IO.LVDS_P6 EEM_IO.LVDS_P7 EEM_IO.LVDS_P8 EEM_IO.LVDS_P9 EEM_IO.LVDS_P10 EEM_IO.LVDS_P11 EEM_IO.LVDS_P12 EEM_IO.LVDS_P13 EEM_IO.LVDS_P14 EEM_IO.LVDS_P15
net class EEM_IO.LVDS_N[0..15]: EEM_IO.LVDS_N0 EEM_IO.LVDS_N1 EEM_IO.LVDS_N2 EEM_IO.LVDS_N3 EEM_IO.LVDS_N4 EEM_IO.LVDS_N5 EEM_IO.LVDS_N6 EEM_IO.LVDS_N7 EEM_IO.LVDS_N8 EEM_IO.LVDS_N9 EEM_IO.LVDS_N10 EEM_IO.LVDS_N11 EEM_IO.LVDS_N12 EEM_IO.LVDS_N13 EEM_IO.LVDS_N14 EEM_IO.LVDS_N15
net class BP_IO.LVDS_P[0..15]: BP_IO.LVDS_P0 BP_IO.LVDS_P1 BP_IO.LVDS_P2 BP_IO.LVDS_P3 BP_IO.LVDS_P4 BP_IO.LVDS_P5 BP_IO.LVDS_P6 BP_IO.LVDS_P7 BP_IO.LVDS_P8 BP_IO.LVDS_P9 BP_IO.LVDS_P10 BP_IO.LVDS_P11 BP_IO.LVDS_P12 BP_IO.LVDS_P13 BP_IO.LVDS_P14 BP_IO.LVDS_P15
net class BP_IO.LVDS_N[0..15]: BP_IO.LVDS_N0 BP_IO.LVDS_N1 BP_IO.LVDS_N2 BP_IO.LVDS_N3 BP_IO.LVDS_N4 BP_IO.LVDS_N5 BP_IO.LVDS_N6 BP_IO.LVDS_N7 BP_IO.LVDS_N8 BP_IO.LVDS_N9 BP_IO.LVDS_N10 BP_IO.LVDS_N11 BP_IO.LVDS_N12 BP_IO.LVDS_N13 BP_IO.LVDS_N14 BP_IO.LVDS_N15
component class U_LNAA: B4A C183A C184A J1A M3A M4A
component class U_AFEA: C6A C7A C8A C9A C10A C11A C12A C13A C14A C15A C16A C17A C18A C19A C20A C21A C22A C23A C24A C25A IC2A IC3A IC4A IC5A IC6A R7A R8A R9A R10A R11A R12A R13A R14A R15A R16A R17A R18A R19A
component class U_ADCA: B1A B3A C3A C4A C5A IC1A R1A R2A R3A R4A R5A R6A
component class EEM_Connectors: C219 C220 C298 C306 C307 D27 IC40 IC43 IC44 IC45 IC46 J8 J9 R143 R144 R145 R146 R147 R148 R149 R150 R151 R152 R156 R157 R158 R159 R161 R162 R163 R164 R167 R168 R169 R170 R171 R172 R173 R174 R175 R176 R177 R186 R187 R188 R189 R190 R257 R260 R261 R262
component class CPCIS_Connectors_P1_P6: C1 C179 C180 C181 C182 D23 D24 D25 D26 IC41 IC42 J6 J7 R37 R130 R131 R133 R136 R138 R153 R154 R155 R160 R165 R166 R178 R179 R180 R181 R182 R183 R184 R185 T1 T2 T19 T20
component class U_Data_Interface: C56 C57 C58 C59 C60 IC9 IC10 IC11 IC12 IC13 R25 R26 R27 R28 R29
net class D100: AD9508_CLK_N AD9508_CLK_P AD9508_OUT0_N AD9508_OUT0_P AD9508_OUT1_N AD9508_OUT1_P AD9508_OUT2_N AD9508_OUT2_P AD9508_OUT3_N AD9508_OUT3_P ADC_DAA_N ADC_DAA_P ADC_DAB_N ADC_DAB_P ADC_DBA_N ADC_DBA_P ADC_DBB_N ADC_DBB_P ADF4350_OUTA_N ADF4350_OUTA_P ADF4350_OUTB_N ADF4350_OUTB_P BP_IO.LVDS_N0 BP_IO.LVDS_N1 BP_IO.LVDS_N2 BP_IO.LVDS_N3 BP_IO.LVDS_N4 BP_IO.LVDS_N5 BP_IO.LVDS_N6 BP_IO.LVDS_N7 BP_IO.LVDS_N8 BP_IO.LVDS_N9 BP_IO.LVDS_N10 BP_IO.LVDS_N11 BP_IO.LVDS_N12 BP_IO.LVDS_N13 BP_IO.LVDS_N14 BP_IO.LVDS_N15 BP_IO.LVDS_P0 BP_IO.LVDS_P1 BP_IO.LVDS_P2 BP_IO.LVDS_P3 BP_IO.LVDS_P4 BP_IO.LVDS_P5 BP_IO.LVDS_P6 BP_IO.LVDS_P7 BP_IO.LVDS_P8 BP_IO.LVDS_P9 BP_IO.LVDS_P10 BP_IO.LVDS_P11 BP_IO.LVDS_P12 BP_IO.LVDS_P13 BP_IO.LVDS_P14 BP_IO.LVDS_P15 DIOT_CLK_N DIOT_CLK_P EEM_IO.LVDS_N0 EEM_IO.LVDS_N1 EEM_IO.LVDS_N2 EEM_IO.LVDS_N3 EEM_IO.LVDS_N4 EEM_IO.LVDS_N5 EEM_IO.LVDS_N6 EEM_IO.LVDS_N7 EEM_IO.LVDS_N8 EEM_IO.LVDS_N9 EEM_IO.LVDS_N10 EEM_IO.LVDS_N11 EEM_IO.LVDS_N12 EEM_IO.LVDS_N13 EEM_IO.LVDS_N14 EEM_IO.LVDS_N15 EEM_IO.LVDS_P0 EEM_IO.LVDS_P1 EEM_IO.LVDS_P2 EEM_IO.LVDS_P3 EEM_IO.LVDS_P4 EEM_IO.LVDS_P5 EEM_IO.LVDS_P6 EEM_IO.LVDS_P7 EEM_IO.LVDS_P8 EEM_IO.LVDS_P9 EEM_IO.LVDS_P10 EEM_IO.LVDS_P11 EEM_IO.LVDS_P12 EEM_IO.LVDS_P13 EEM_IO.LVDS_P14 EEM_IO.LVDS_P15
net class ADC_IN: ADC_AUXINA_N ADC_AUXINA_P ADC_AUXINB_N ADC_AUXINB_P ADC_INA_N ADC_INA_P ADC_INB_N ADC_INB_P ADCINA_N ADCINA_P ADCINB_N ADCINB_P
component class U_PLL: B2 B5 B6 B7 B8 B9 B10 B11 C26 C27 C28 C29 C30 C31 C32 C33 C34 C35 C36 C37 C38 C39 C40 C41 C42 C43 C44 C45 C46 C47 C48 C49 C50 C51 C52 C53 C54 C55 C82 C154 C155 C156 C157 IC7 IC8 IC35 L2 L3 L4 L5 L6 OSC1 R20 R21 R22 R23 R24 R30 R123 R124 R125 R126
component class U_LNAB: B4B C183B C184B J1B M3B M4B
component class U_Isolated_Power_supply: B12 B13 B14 B15 B16 B17 B18 B19 B20 B21 B22 B23 B24 B25 B26 B27 B28 B29 B30 B31 B32 B33 B34 B35 B36 B37 B38 B39 B40 B41 BUSH1 C61 C62 C63 C64 C65 C66 C67 C68 C69 C70 C71 C72 C73 C74 C75 C76 C77 C78 C79 C80 C81 C83 C84 C85 C86 C87 C88 C89 C90 C91 C92 C93 C94 C95 C96 C97 C98 C99 C100 C101 C102 C103 C104 C105 C106 C107 C108 C109 C110 C111 C112 C113 C114 C115 C116 C130 C131 C132 C135 C136 C137 C138 C139 C140 C141 C142 C143 C144 C145 C146 C158 C159 C160 C161 C162 C163 C164 C165 C166 C167 C168 C169 C170 C171 C172 C173 C174 C175 C176 C177 C178 D1 D2 D3 D4 D5 D6 D7 D8 D13 D14 D15 D16 D21 D22 FL1 IC14 IC15 IC16 IC17 IC18 IC19 IC20 IC21 IC22 IC23 IC24 IC25 IC30 IC31 IC32 IC36 IC37 IC38 IC39 J2 L1 L7 L8 L9 L10 L11 LD1 LD2 LD3 LD4 LD5 LD6 LD7 LD8 LD9 LD10 LD11 P1 R32 R33 R34 R35 R38 R39 R40 R41 R42 R43 R44 R45 R46 R47 R48 R49 R50 R51 R52 R53 R54 R55 R56 R57 R58 R59 R60 R61 R62 R63 R64 R65 R66 R67 R68 R69 R70 R71 R72 R73 R74 R75 R76 R77 R78 R100 R101 R102 R103 R104 R105 R106 R107 R108 R109 R110 R111 R112 R113 R114 R115 R116 R117 R118 R127 R128 R129 R132 R134 R135 R137 R139 R140 R141 R142 R191 R192 R193 R194 R195 R196 R197 R198 R199 SW1 T3 T4 T5 T6 T7 T8 T9 T10 T11 T18 T21 T22 Tr1
component class U_AFEB: C6B C7B C8B C9B C10B C11B C12B C13B C14B C15B C16B C17B C18B C19B C20B C21B C22B C23B C24B C25B IC2B IC3B IC4B IC5B IC6B R7B R8B R9B R10B R11B R12B R13B R14B R15B R16B R17B R18B R19B
component class U_ADCB: B1B B3B C3B C4B C5B IC1B R1B R2B R3B R4B R5B R6B
component class U_Optocouplers: C117 C118 C119 C120 C121 C122 C123 C124 C125 C126 C127 C128 C129 C133 C134 C147 C148 C149 C150 C151 C152 C153 IC26 IC27 IC28 IC29 IC33 IC34 MOD1 MOD2 R79 R80 R81 R82 R83 R84 R85 R86 R87 R88 R89 R90 R91 R92 R93 R94 R95 R96 R97 R98 R99 R119 R120 R121 T12 T13 T14 T15 T16 T17
component class ADC_40M20b: C2 M1 M2 R31 R36 R122
differential pair PE_CLK.CLK: +PE_CLK.CLK_P -PE_CLK.CLK_N
differential pair EEM_IO.LVDS15: +EEM_IO.LVDS_P15 -EEM_IO.LVDS_N15
differential pair EEM_IO.LVDS14: +EEM_IO.LVDS_P14 -EEM_IO.LVDS_N14
differential pair EEM_IO.LVDS13: +EEM_IO.LVDS_P13 -EEM_IO.LVDS_N13
differential pair EEM_IO.LVDS12: +EEM_IO.LVDS_P12 -EEM_IO.LVDS_N12
differential pair EEM_IO.LVDS11: +EEM_IO.LVDS_P11 -EEM_IO.LVDS_N11
differential pair EEM_IO.LVDS10: +EEM_IO.LVDS_P10 -EEM_IO.LVDS_N10
differential pair EEM_IO.LVDS9: +EEM_IO.LVDS_P9 -EEM_IO.LVDS_N9
differential pair EEM_IO.LVDS8: +EEM_IO.LVDS_P8 -EEM_IO.LVDS_N8
differential pair EEM_IO.LVDS7: +EEM_IO.LVDS_P7 -EEM_IO.LVDS_N7
differential pair EEM_IO.LVDS6: +EEM_IO.LVDS_P6 -EEM_IO.LVDS_N6
differential pair EEM_IO.LVDS5: +EEM_IO.LVDS_P5 -EEM_IO.LVDS_N5
differential pair EEM_IO.LVDS4: +EEM_IO.LVDS_P4 -EEM_IO.LVDS_N4
differential pair EEM_IO.LVDS3: +EEM_IO.LVDS_P3 -EEM_IO.LVDS_N3
differential pair EEM_IO.LVDS2: +EEM_IO.LVDS_P2 -EEM_IO.LVDS_N2
differential pair EEM_IO.LVDS1: +EEM_IO.LVDS_P1 -EEM_IO.LVDS_N1
differential pair EEM_IO.LVDS0: +EEM_IO.LVDS_P0 -EEM_IO.LVDS_N0
differential pair BP_MGT_Tx: +BP_MGT_Tx_P -BP_MGT_Tx_N
differential pair BP_MGT_Rx: +BP_MGT_Rx_P -BP_MGT_Rx_N
differential pair BP_IO.LVDS15: +BP_IO.LVDS_P15 -BP_IO.LVDS_N15
differential pair BP_IO.LVDS14: +BP_IO.LVDS_P14 -BP_IO.LVDS_N14
differential pair BP_IO.LVDS13: +BP_IO.LVDS_P13 -BP_IO.LVDS_N13
differential pair BP_IO.LVDS12: +BP_IO.LVDS_P12 -BP_IO.LVDS_N12
differential pair BP_IO.LVDS11: +BP_IO.LVDS_P11 -BP_IO.LVDS_N11
differential pair BP_IO.LVDS10: +BP_IO.LVDS_P10 -BP_IO.LVDS_N10
differential pair BP_IO.LVDS9: +BP_IO.LVDS_P9 -BP_IO.LVDS_N9
differential pair BP_IO.LVDS8: +BP_IO.LVDS_P8 -BP_IO.LVDS_N8
differential pair BP_IO.LVDS7: +BP_IO.LVDS_P7 -BP_IO.LVDS_N7
differential pair BP_IO.LVDS6: +BP_IO.LVDS_P6 -BP_IO.LVDS_N6
differential pair BP_IO.LVDS5: +BP_IO.LVDS_P5 -BP_IO.LVDS_N5
differential pair BP_IO.LVDS4: +BP_IO.LVDS_P4 -BP_IO.LVDS_N4
differential pair BP_IO.LVDS3: +BP_IO.LVDS_P3 -BP_IO.LVDS_N3
differential pair BP_IO.LVDS2: +BP_IO.LVDS_P2 -BP_IO.LVDS_N2
differential pair BP_IO.LVDS1: +BP_IO.LVDS_P1 -BP_IO.LVDS_N1
differential pair BP_IO.LVDS0: +BP_IO.LVDS_P0 -BP_IO.LVDS_N0
differential pair ADCINB: +ADCINB_P -ADCINB_N
differential pair ADCINA: +ADCINA_P -ADCINA_N
differential pair ADC_INB: +ADC_INB_P -ADC_INB_N
differential pair ADC_INA: +ADC_INA_P -ADC_INA_N
differential pair ADC_DBB: +ADC_DBB_P -ADC_DBB_N
differential pair ADC_DBA: +ADC_DBA_P -ADC_DBA_N
differential pair ADC_DAB: +ADC_DAB_P -ADC_DAB_N
differential pair ADC_DAA: +ADC_DAA_P -ADC_DAA_N
differential pair ADC_AUXINB: +ADC_AUXINB_P -ADC_AUXINB_N
differential pair ADC_AUXINA: +ADC_AUXINA_P -ADC_AUXINA_N
differential pair AD9508_OUT3: +AD9508_OUT3_P -AD9508_OUT3_N
differential pair AD9508_OUT2: +AD9508_OUT2_P -AD9508_OUT2_N
differential pair DIOT_CLK: +DIOT_CLK_P -DIOT_CLK_N
differential pair ADF4350_OUTB: +ADF4350_OUTB_P -ADF4350_OUTB_N
differential pair ADF4350_OUTA: +ADF4350_OUTA_P -ADF4350_OUTA_N
differential pair AD9508_OUT1: +AD9508_OUT1_P -AD9508_OUT1_N
differential pair AD9508_OUT0: +AD9508_OUT0_P -AD9508_OUT0_N
differential pair AD9508_CLK: +AD9508_CLK_P -AD9508_CLK_N

## Components (designator, comment, footprint, x,y, rotation, side; value= is the part's Value field where it differs from the comment)
B1A "SMD Pad" C100 54.4,17.65 r0 top (schematic designator B1)
B1B "SMD Pad" C100 54.4,62.1 r0 top (schematic designator B1)
B2 "SMD Pad" C100 101.55,14.925 r0 top
B3A "SMD Pad" C100 103.7,1.6 r0 top (schematic designator B3)
B3B "SMD Pad" C100 99.5,2.5 r90 top (schematic designator B3)
B4A "SMD Pad" C100 98.1,1.6 r90 top (schematic designator B4)
B4B "SMD Pad" C100 100.9,1.6 r0 top (schematic designator B4)
B5 "SMD Pad" C100 100,28.3 r0 top
B6 "SMD Pad" C100 28,45.5 r0 top
B7 "SMD Pad" C100 25.4,45.5 r0 top
B8 "SMD Pad" C100 30.5,45.5 r0 top
B9 "SMD Pad" C100 105.1,2.5 r0 top
B10 "SMD Pad" C100 102.3,2.5 r90 top
B11 "SMD Pad" C100 106.5,1.6 r90 top
B12 "SMD Pad" C100 77.4,57.2 r135 top
B13 "SMD Pad" C100 73.2,63 r90 top
B14 "SMD Pad" C100 83.1,50.3 r135 top
B15 "SMD Pad" C100 174.5,84.7 r90 top
B16 "SMD Pad" C100 78.6,81.1 r90 top
B17 "SMD Pad" C100 78.5,76.1 r90 top
B18 "SMD Pad" C100 71,80.2 r90 top
B19 "SMD Pad" C100 17.1,74.2 r90 top
B20 "SMD Pad" C100 108.7,42.3 r90 top
B21 "SMD Pad" C100 41,79.3 r90 top
B22 "SMD Pad" C100 90.7,5.9 r90 top
B23 "SMD Pad" C100 5.8,69.3 r90 top
B24 "SMD Pad" C100 86.5,31.4 r90 top
B25 "SMD Pad" C100 52.1,77.232 r90 top
B26 "SMD Pad" C100 30.2,77 r90 top
B27 "SMD Pad" C100 58.5,57 r90 top
B28 "SMD Pad" C100 91.8,31.9 r90 top
B29 "SMD Pad" C100 58.5,12.55 r90 top
B30 "SMD Pad" C100 177.3,67.9 r90 top
B31 "SMD Pad" C100 170.4,10.9 r90 top
B32 "SMD Pad" C100 193.1,89.2 r90 top
B33 "SMD Pad" C100 46.3,79.4 r90 top
B34 "SMD Pad" C100 52.9,52.5 r90 top
B35 "SMD Pad" C100 53,8 r90 top
B36 "Non Plated Hole" MTG300 101.226,89.744 r37 top
B37 "Non Plated Hole" MTG300 109.652,78.563 r37 top
B38 "Non Plated Hole" MTG300 107.58,49.628 r161 top
B39 "Non Plated Hole" MTG300 112.138,62.866 r161 top
B40 "Non Plated Hole" MTG300 124.056,70.904 r267 top
B41 "Non Plated Hole" MTG300 138.036,70.171 r267 top
BUSH1 "M2.5" WURTH_9774010151 115.068,71.375 r0 top locked
C1 "100nF" CAPC1005X55N 175.8,4.7 r90 top
C2 "22pF" CAPC1005X55N 5.1,-2 r0 top
C3A "27pF" CAPC1005X55N 52.3,20.85 r90 top (schematic designator C3)
C3B "27pF" CAPC1005X55N 52.3,65.3 r90 top (schematic designator C3)
C4A "10pF" CAPC1005X55N 52.3,20.85 r90 bottom (schematic designator C4)
C4B "10pF" CAPC1005X55N 52.3,65.3 r90 bottom (schematic designator C4)
C5A "100nF" CAPC1005X55N 56.5,17.65 r180 top (schematic designator C5)
C5B "100nF" CAPC1005X55N 56.5,62.1 r180 top (schematic designator C5)
C6A "100nF" CAPC1005X55N 21.6,21.05 r90 top (schematic designator C6)
C6B "100nF" CAPC1005X55N 21.6,65.5 r90 top (schematic designator C6)
C7A "47uF" CAPC3216X180N 47.1,29.55 r270 top (schematic designator C7)
C7B "47uF" CAPC3216X180N 47.1,74 r270 top (schematic designator C7)
C8A "100nF" CAPC1005X55N 45.3,28.15 r270 top (schematic designator C8)
C8B "100nF" CAPC1005X55N 45.3,72.6 r270 top (schematic designator C8)
C9A "82pF" CAPC1005X55N 26.7,21.95 r90 top (schematic designator C9)
C9B "82pF" CAPC1005X55N 26.7,66.4 r90 top (schematic designator C9)
C10A "100nF" CAPC1005X55N 30.3,17.55 r180 top (schematic designator C10)
C10B "100nF" CAPC1005X55N 30.3,62 r180 top (schematic designator C10)
C11A "22pF" CAPC1005X55N 36.5,24.05 r90 top (schematic designator C11)
C11B "22pF" CAPC1005X55N 36.5,68.5 r90 top (schematic designator C11)
C12A "47uF" CAPC3216X180N 40.2,21.95 r180 top (schematic designator C12)
C12B "47uF" CAPC3216X180N 40.2,66.4 r180 top (schematic designator C12)
C13A "100nF" CAPC1005X55N 39.4,23.65 r180 top (schematic designator C13)
C13B "100nF" CAPC1005X55N 39.4,68.1 r180 top (schematic designator C13)
C14A "100nF" CAPC1005X55N 19.6,25.75 r180 top (schematic designator C14)
C14B "100nF" CAPC1005X55N 19.6,70.2 r180 top (schematic designator C14)
C15A "1nF" CAPC1005X55N 34.9,20.85 r90 top (schematic designator C15)
C15B "1nF" CAPC1005X55N 34.9,65.3 r90 top (schematic designator C15)
C16A "47uF" CAPC3216X180N 47.1,18.55 r270 top (schematic designator C16)
C16B "47uF" CAPC3216X180N 47.1,63 r270 top (schematic designator C16)
C17A "100nF" CAPC1005X55N 45.3,17.15 r270 top (schematic designator C17)
C17B "100nF" CAPC1005X55N 45.3,61.6 r270 top (schematic designator C17)
C18A "100nF" CAPC1005X55N 21.6,14.35 r90 top (schematic designator C18)
C18B "100nF" CAPC1005X55N 21.6,58.8 r90 top (schematic designator C18)
C19A "100nF" CAPC1005X55N 33.4,18.85 r180 top (schematic designator C19)
C19B "100nF" CAPC1005X55N 33.4,63.3 r180 top (schematic designator C19)
C20A "82pF" CAPC1005X55N 26.7,19.75 r270 top (schematic designator C20)
C20B "82pF" CAPC1005X55N 26.7,64.2 r270 top (schematic designator C20)
C21A "100nF" CAPC1005X55N 30.3,24.25 r180 top (schematic designator C21)
C21B "100nF" CAPC1005X55N 30.3,68.7 r180 top (schematic designator C21)
C22A "22pF" CAPC1005X55N 36.5,13.05 r90 top (schematic designator C22)
C22B "22pF" CAPC1005X55N 36.5,57.5 r90 top (schematic designator C22)
C23A "47uF" CAPC3216X180N 40.2,10.95 r180 top (schematic designator C23)
C23B "47uF" CAPC3216X180N 40.2,55.4 r180 top (schematic designator C23)
C24A "100nF" CAPC1005X55N 39.4,12.65 r180 top (schematic designator C24)
C24B "100nF" CAPC1005X55N 39.4,57.1 r180 top (schematic designator C24)
C25A "100nF" CAPC1005X55N 19.6,18.95 r180 top (schematic designator C25)
C25B "100nF" CAPC1005X55N 19.6,63.4 r180 top (schematic designator C25)
C26 "10nF" CAPC1005X55N 87,13.725 r0 top
C27 "10nF" CAPC1005X55N 87,12.725 r0 top
C28 "10nF" CAPC1005X55N 87,9.825 r0 top
C29 "10nF" CAPC1005X55N 87,8.825 r0 top
C30 "390pF" CAPC1005X55N 93.45,17.925 r270 top
C31 "100nF" CAPC1005X55N 90.25,15.225 r270 top
C32 "10pF" CAPC1005X55N 91.25,15.225 r270 top
C33 "100nF" CAPC1005X55N 95.05,18.425 r180 top
C34 "10pF" CAPC1005X55N 95.05,17.425 r180 top
C35 "100nF" CAPC1005X55N 99.95,15.225 r90 top
C36 "10uF" CAPMP3216X180N 78,18.925 r90 top
C37 "100nF" CAPC1005X55N 79.7,9.125 r90 top
C38 "100nF" CAPC1005X55N 79.7,17.425 r270 top
C39 "100nF" CAPC1005X55N 76.3,20.525 r270 top
C40 "470nF" CAPC1005X55N 80.8,17.425 r270 top
C41 "470nF" CAPC1005X55N 80.8,9.125 r90 top
C42 "10pF" CAPC1005X55N 98.95,15.225 r90 top
C43 "100nF" CAPC1005X55N 99.95,12.425 r90 top
C44 "10pF" CAPC1005X55N 98.95,12.425 r90 top
C45 "1nF" CAPC1608X90N 91.35,20.125 r180 top
C46 "1nF" CAPC1608X90N 91.35,18.625 r180 top
C47 "27nF" CAPC1005X55N 93.45,20.825 r90 top
C48 "100nF" CAPC1005X55N 93.09,7.925 r180 top
C49 "10pF" CAPC1005X55N 93.09,8.925 r180 top
C50 "100nF" CAPC1005X55N 98.45,8.425 r90 top
C51 "10pF" CAPC1005X55N 97.45,8.425 r90 top
C52 "100nF" CAPC1005X55N 100.35,9.625 r180 top
C53 "10pF" CAPC1005X55N 100.35,10.625 r180 top
C54 "100nF" CAPC1005X55N 95.03,7.925 r180 top
C55 "10pF" CAPC1005X55N 95.03,8.925 r180 top
C56 "100nF" CAPC1005X55N 152.4,62.4 r270 top
C57 "100nF" CAPC1005X55N 152.4,56.7 r270 top
C58 "100nF" CAPC1005X55N 108.3,3.5 r90 top
C59 "100nF" CAPC1005X55N 161.4,43.3 r180 top
C60 "100nF" CAPC1005X55N 158.7,48.9 r180 top
C61 "22uF" CAPC2012X135N 80.1,54.9 r90 top
C62 "4.7uF" CAPC1608X90N 78.2,54.8 r90 top
C63 "10uF" CAPC2012X95N 78.5,51.5 r270 top
C64 "10uF" CAPC2012X95N 80.5,51.5 r270 top
C65 "10nF" CAPC1005X55N 74.1,49.4 r180 top
C66 "22uF" CAPC2012X135N 76.868,83.275 r0 top
C67 "4.7uF" CAPC1608X90N 76.668,84.975 r0 top
C68 "10uF" CAPC2012X95N 72.768,82.675 r180 top
C69 "10uF" CAPC2012X95N 72.768,84.775 r180 top
C70 "10nF" CAPC1005X55N 71.768,88.275 r90 top
C71 "47uF" CAPC3216X180N 25.875,78.762 r0 top
C72 "47uF" CAPC3216X180N 25.875,76.562 r0 top
C73 "47uF" CAPC3216X180N 76,61.5 r180 top
C74 "47uF" CAPC3216X180N 76,59.1 r180 top
C75 "4.7uF" CAPC1608X90N 24.975,80.662 r0 top
C76 "10uF" CAPMP3216X180N 21.675,74.162 r0 top
C77 "10uF" CAPC2012X95N 21.675,78.362 r180 top
C78 "10uF" CAPC2012X95N 21.675,80.387 r180 top
C79 "10uF" CAPC2012X95N 21.675,76.362 r180 top
C80 "4.7uF" CAPC1608X90N 104.744,35.716 r270 top
C81 "4.7uF" CAPC1608X90N 104.744,38.816 r90 top
C82 "100nF" CAPC1005X55N 97.65,26.325 r0 top
C83 "4.7uF" CAPC1608X90N 47.293,81.65 r0 top
C84 "10nF" CAPC1005X55N 19.575,84.762 r90 top
C85 "10uF" CAPC2012X95N 43.993,81.45 r180 top
C86 "10uF" CAPC2012X95N 43.993,79.35 r180 top
C87 "4.7uF" CAPC1608X90N 96.75,5.9 r0 top
C88 "4.7uF" CAPC1608X90N 93.65,5.9 r180 top
C89 "10nF" CAPC1005X55N 41.893,85.75 r90 top
C90 "47uF" CAPC3216X180N 76,67 r0 top
C91 "47uF" CAPC3216X180N 76,64.5 r0 top
C92 "47uF" CAPC3216X180N 80.7,79.4 r270 top
C93 "47uF" CAPC3216X180N 83.2,79.4 r270 top
C94 "47uF" CAPC3216X180N 80.7,74.6 r270 top
C95 "47uF" CAPC3216X180N 83.2,74.6 r270 top
C96 "10uF" CAPMP3216X180N 9,70.925 r0 top
C97 "4.7uF" CAPC1608X90N 86.6,25 r270 top
C98 "10uF" CAPC2012X95N 9.1,75.325 r180 top
C99 "10uF" CAPC2012X95N 9.1,77.425 r180 top
C100 "10uF" CAPC2012X95N 9.1,73.125 r180 top
C101 "4.7uF" CAPC1608X90N 86.6,28.1 r90 top
C102 "22uF" CAPC2012X135N 13.2,75.925 r0 top
C103 "4.7uF" CAPC1608X90N 13,77.625 r0 top
C104 "4.7uF" CAPC1608X90N 58.243,81.675 r0 top
C105 "4.7uF" CAPC1608X90N 36.918,79.325 r0 top
C106 "10uF" CAPC2012X95N 54.943,81.475 r180 top
C107 "10uF" CAPC2012X95N 54.943,79.375 r180 top
C108 "10nF" CAPC1005X55N 8.1,80.925 r90 top
C109 "10uF" CAPC2012X95N 33.618,77.025 r180 top
C110 "10uF" CAPC2012X95N 33.618,79.125 r180 top
C111 "10nF" CAPC1005X55N 52.843,85.775 r90 top
C112 "100nF" CAPC1005X55N 56,8.05 r180 top
C113 "47uF" CAPC2012X140N 56.7,60.5 r180 top
C114 "10nF" CAPC1005X55N 31.518,83.425 r90 top
C115 "100nF" CAPC1005X55N 56,52.5 r180 top
C116 "47uF" CAPC2012X140N 56.7,16.05 r180 top
C117 "10uF" CAPC2012X95N 108.668,38.875 r90 top
C118 "10uF" CAPC2012X95N 106.568,38.875 r90 top
C119 "10uF" CAPC2012X95N 159.232,0.575 r270 bottom
C120 "10uF" CAPC2012X95N 157.132,0.575 r270 bottom
C121 "100nF" CAPC1005X55N 149.036,2.95 r90 bottom
C122 "100nF" CAPC1005X55N 119.782,11.638 r270 top
C123 "1uF" CAPC1005X55N 118.782,11.638 r270 top
C124 "100nF" CAPC1005X55N 127.2,46.8 r270 bottom
C125 "1uF" CAPC1005X55N 153.5,40.3 r90 bottom
C126 "100nF" CAPC1005X55N 154.5,40.3 r90 bottom
C127 "100nF" CAPC1005X55N 127.2,11.6 r270 bottom
C128 "100nF" CAPC1005X55N 120.5,38 r270 bottom
C129 "1uF" CAPC1005X55N 153.5,5.1 r90 bottom
C130 "10uF" CAPC3216X180N 134.1,88.6 r0 bottom
C131 "47uF" CAPC3216X180N 134.1,86.3 r0 bottom
C132 "100nF" CAPC1005X55N 149.8,90.1 r180 top
C133 "100nF" CAPC1005X55N 154.5,5.1 r90 bottom
C134 "1uF" CAPC1005X55N 145,29.6 r180 bottom
C135 "10uF" CAPC3216X180N 159.4,88.1 r90 top
C136 "100nF" CAPC1005X55N 154.9,90 r180 bottom
C137 "100nF" CAPC4532X250N 139.3,82.1 r180 bottom
C138 "270pF" CAPC1608X87N 152.2,77.6 r0 top
C139 "220pF" CAPC3225X200N 159.6,73.2 r180 top
C140 "220pF" CAPC3225X200N 154.9,73.2 r180 top
C141 "100nF" CAPC1005X55N 148.6,85.3 r90 bottom
C142 "1nF" CAPC1608X90N 151.4,80.1 r90 top
C143 "1uF" CAPC1608X87N 148.3,80.1 r90 top
C144 "1uF" CAPC1608X87N 155.7,79.5 r180 top
C145 "100nF" CAPC1005X55N 124.668,48.375 r90 top
C146 "270pF" CAPC1608X87N 121.268,46.975 r180 top
C147 "100nF" CAPC1005X55N 144.4,31.2 r270 bottom
C148 "100nF" CAPC1005X55N 120.5,20.4 r270 bottom
C149 "100nF" CAPC1005X55N 127.2,29.2 r270 bottom
C150 "1uF" CAPC1005X55N 145,12 r180 bottom
C151 "100nF" CAPC1005X55N 144.4,13.6 r270 bottom
C152 "1uF" CAPC1005X55N 153.5,22.7 r90 bottom
C153 "100nF" CAPC1005X55N 154.5,22.7 r90 bottom
C154 "100nF" CAPC1005X55N 97.65,27.325 r0 top
C155 "4.7uF" CAPC1608X90N 93.05,27.325 r0 top
C156 "100nF" CAPC1005X55N 102.15,25.325 r180 top
C157 "100nF" CAPC1005X55N 92.05,29.425 r270 top
C158 "100nF" CAPC1005X55N 168.9,74.6 r0 top
C159 "100nF" CAPC1005X55N 168.9,73.6 r0 top
C160 "22uF" CAPC2012X135N 168.8,70.1 r0 top
C161 "22uF" CAPC2012X135N 168.8,72.1 r0 top
C162 "22uF" CAPC2012X135N 173.2,70 r0 top
C163 "10uF" CAPMP3216X180N 173.6,72.2 r180 top
C164 "100nF" CAPC1005X55N 180.55,78 r90 top
C165 "22uF" CAPC2012X135N 182.2,78.3 r90 top
C166 "100nF" CAPC1005X55N 177.5,75.7 r90 top
C167 "47uF" CAPC3216X180N 174.4,87.9 r270 top
C168 "47uF" CAPC3216X180N 161.809,88.077 r270 top
C169 "100nF" CAPC1005X55N 184.6,15.7 r90 top
C170 "10uF" CAPC2012X95N 184.5,86.9 r90 bottom
C171 "10uF" CAPC2012X95N 182.4,86.9 r90 bottom
C172 "10uF" CAPC2012X95N 188,76.3 r180 bottom
C173 "1uF" CAPC1608X87N 192.1,6.6 r180 top
C174 "4.7uF" CAPMP3216X180N 192.3,12.9 r0 top
C175 "10uF" CAPMP3216X180N 90.25,29.125 r90 top
C176 "100nF" CAPC1005X55N 88.55,30.625 r270 top
C177 "100nF" CAPC1005X55N 90.65,23.725 r90 top
C178 "4.7uF" CAPC1608X90N 95.55,24.625 r90 top
C179 "22uF" CAPC2012X135N 186.1,7.8 r270 top
C180 "100nF" CAPC1005X55N 173.6,-2 r0 top
C181 "100nF" CAPC1005X55N 170.7,-2 r180 top
C182 "1uF" CAPC1608X87N 173.3,10.1 r0 top
C183A "47uF" CAPC3216X180N 15,4.6 r180 bottom (schematic designator C183)
C183B "47uF" CAPC3216X180N 15,49.05 r180 bottom (schematic designator C183)
C184A "47uF" CAPC3216X180N 15,11.9 r180 bottom (schematic designator C184)
C184B "47uF" CAPC3216X180N 15,56.35 r180 bottom (schematic designator C184)
C219 "100nF" CAPC1005X55N 206.9,20.5 r90 top
C220 "100nF" CAPC1005X55N 206.9,26.15 r90 top
C298 "100nF" CAPC1005X55N 181.7,15.8 r0 top
C306 "100nF" CAPC1005X55N 209.4,15.2 r0 top
C307 "100nF" CAPC1005X55N 209.4,20.9 r0 top
D1 "BAT165" SOD2512X110N 144,86.9 r180 top
D2 "SS16" DIOM5127X229N 82.4,61.9 r0 top
D3 "SS16" DIOM5127X229N 82.4,58.5 r0 top
D4 "BAT165" SOD2512X110N 144,88.9 r180 top
D5 "SS16" DIOM5127X229N 89.3,61.9 r0 top
D6 "SS16" DIOM5127X229N 89.3,58.5 r0 top
D7 "BAT165" SOD2512X110N 156.1,77.7 r0 top
D8 "BAT165" SOD2512X110N 156.1,75.7 r180 top
D13 "SS16" DIOM5127X229N 84,87.5 r180 top
D14 "SS16" DIOM5127X229N 84,84.1 r180 top
D15 "SS16" DIOM5127X229N 90.9,87.5 r180 top
D16 "SS16" DIOM5127X229N 90.9,84.1 r180 top
D21 "SMBJ12A" DIOM5336X265N 187.8,86.3 r270 bottom
D22 "BAT165" SOD2512X110N 192.3,15 r180 top
D23 "PESD3V3L5UY" SOT65P210X110-6N 192.6,2.5 r0 top
D24 "PESD3V3L5UY" SOT65P210X110-6N 192.7,-0.3 r0 top
D25 "CDBU0520-HF" SOD-523F 173.4,7 r180 top
D26 "CDBU0520-HF" SOD-523F 173.4,8.5 r180 top
D27 "PESD3V3L5UY" SOT65P210X110-6N 182,25.5 r180 top
FL1 "10A/50VDC" FIL_MURATA_BNX02 187.9,82.3 r90 top locked
IC1A "AD4080BBCZ" BGA49C65P7X7_500X500X138 56.1,21.175 r0 top locked (schematic designator IC1)
IC1B "AD4080BBCZ" BGA49C65P7X7_500X500X138 56.1,65.625 r0 top (schematic designator IC1)
IC2A "LT6236HS6#TRMPBF" SOT95P280X100-6N 19.1,22.85 r270 top (schematic designator IC2)
IC2B "LT6236HS6#TRMPBF" SOT95P280X100-6N 19.1,67.3 r270 top (schematic designator IC2)
IC3A "ADA4899-1YRDZ" SOIC127P600X175-9N-S229 40.9,27.05 r0 top (schematic designator IC3)
IC3B "ADA4899-1YRDZ" SOIC127P600X175-9N-S229 40.9,71.5 r0 top (schematic designator IC3)
IC4A "ADA4945-1ACPZ-R2" QFN50P300X300X80_HS-17N 29.9,20.85 r0 top (schematic designator IC4)
IC4B "ADA4945-1ACPZ-R2" QFN50P300X300X80_HS-17N 29.9,65.3 r0 top (schematic designator IC4)
IC5A "ADA4899-1YRDZ" SOIC127P600X175-9N-S229 40.9,16.05 r0 top (schematic designator IC5)
IC5B "ADA4899-1YRDZ" SOIC127P600X175-9N-S229 40.9,60.5 r0 top (schematic designator IC5)
IC6A "LT6236HS6#TRMPBF" SOT95P280X100-6N 19.1,16.05 r270 top (schematic designator IC6)
IC6B "LT6236HS6#TRMPBF" SOT95P280X100-6N 19.1,60.5 r270 top (schematic designator IC6)
IC7 "ADF4350BCPZ" QFN50P500X500X80-33N-S325 95.05,13.225 r270 top
IC8 "AD9508BCPZ" QFN50P400X400X80_HS-25N 81.6,13.225 r270 top
IC9 "FIN1027AMX" SOIC127P600X175-8N 156.8,63.7 r0 top
IC10 "74HC138PW" SOP65P640X110-16N 106,8.7 r270 top
IC11 "FIN1028MX" SOIC127P600X175-8N 156.8,58 r180 top
IC12 "FIN1028MX" SOIC127P600X175-8N 163.6,46.7 r180 top
IC13 "FIN1028MX" SOIC127P600X175-8N 160.9,52.3 r180 top
IC14 "LT3045EMSE" SOP65P490X110-13N-R175X294 74.9,53.2 r270 top
IC15 "LT3094EDD" SON45P300X300X80-13N-R175X248 74.868,87.675 r180 top
IC16 "LT3045EMSE" SOP65P490X110-13N-R175X294 23.375,83.962 r180 top
IC17 "LP5912-3.3DRVT" SON65P200X200X80-7N-R110X170 102.644,37.216 r270 top
IC18 "LT3045EMSE" SOP65P490X110-13N-R175X294 45.693,84.95 r180 top
IC19 "LP5912-3.3DRVT" SON65P200X200X80-7N-R110X170 95.25,3.8 r0 top
IC20 "LT3094EDD" SON45P300X300X80-13N-R175X248 11.2,80.325 r180 top
IC21 "LP5912-3.3DRVT" SON65P200X200X80-7N-R110X170 84.5,26.5 r270 top
IC22 "LT3045EMSE" SOP65P490X110-13N-R175X294 56.643,84.975 r180 top
IC23 "LT3045EMSE" SOP65P490X110-13N-R175X294 35.318,82.625 r180 top
IC24 "LTC6655BHMS8-3" SOP65P490X110-8N 55.8,56.2 r90 top
IC25 "LTC6655BHMS8-3" SOP65P490X110-8N 55.8,11.75 r90 top
IC26 "AFBR-390525RZ" BROADCOM_AFBR-390525RZ 134.768,2.875 r0 top locked
IC27 "AFBR-390525RZ" BROADCOM_AFBR-390525RZ 141.468,46.875 r180 top locked
IC28 "AFBR-390525RZ" BROADCOM_AFBR-390525RZ 141.468,11.675 r180 top locked
IC29 "AFBR-390525RZ" BROADCOM_AFBR-390525RZ 134.768,38.075 r180 top locked
IC30 "L6599AD" SOP127P600X175-16N 153,85.7 r90 top locked
IC31 "OPI1264C" OPI1264C 139.168,61.475 r225 top
IC32 "TL431AIDBZ" SOT95P237X112-3N 123.768,45.575 r180 top
IC33 "AFBR-390525RZ" BROADCOM_AFBR-390525RZ 134.768,20.475 r180 top locked
IC34 "AFBR-390525RZ" BROADCOM_AFBR-390525RZ 141.468,29.275 r180 top locked
IC35 "AD5662BRJZ-2500RL7" SOT65P280X145-8N 94.45,30.225 r90 top
IC36 "TPS62148RGX" TEXAS_RGX0011A 178.25,78.9 r180 top
IC37 "LM75AIMM/NOPB" SOP65P490X109-8N 187,13.1 r90 top
IC38 "MIC5219-3.3YM5" SOT95P280X145-5N 192.3,9.6 r90 top
IC39 "TL431AIDBZ" SOT95P237X112-3N 93.05,24.625 r270 top
IC40 "74HC4066PW" SOP65P640X110-14N 179.2,12.4 r0 top
IC41 "74HC4066PW" SOP65P640X110-14N 179.2,1.7 r90 top
IC42 "TLC555ID" SOIC127P600X175-8N 172.1,2.4 r270 top
IC43 "24AA02E48T-I/OT" SOT95P280X145-5N 208.5,17.6 r0 top
IC44 "24AA025E48-I/SN" SOIC127P600X175-8N 202.5,18.6 r0 top
IC45 "24AA02E48T-I/OT" SOT95P280X145-5N 208.5,23.3 r0 top
IC46 "24AA025E48-I/SN" SOIC127P600X175-8N 202.5,24.2 r0 top
J1A "Header 20" SAMTEC_HTSW-110-23-L-D 19.082,8.188 r180 top locked (schematic designator J1)
J1B "Header 20" SAMTEC_HTSW-110-23-L-D 19.082,52.638 r180 top locked (schematic designator J1)
J2 "Mini-Fit Jr.™" MOLEX_39-30-0040 199.895,65.189 r270 top locked
J6 "P1" AMPHENOL_10052825-101LF 206.733,3.988 r90 top locked
J7 "P6" AMPHENOL_10052838-101LF 206.733,82.988 r90 top locked
J8 "" 3M_N2530-6002RB 193.057,38.768 r270 top locked
J9 "" 3M_N2530-6002RB 174.287,38.767 r270 top locked
L1 "1.5uH" IND_WURTH_WE-LHMI_7050 171.8,78.8 r180 top
L2 "100nH" INDC1005X55N 88.5,14.225 r90 top
L3 "120R@100MHz" INDC1608X65N 76,18.025 r270 top
L4 "100nH" INDC1005X55N 88.5,12.225 r270 top
L5 "100nH" INDC1005X55N 88.5,10.325 r90 top
L6 "100nH" INDC1005X55N 88.5,8.325 r270 top
L7 "600R@100MHz" INDC1608X95N 19.275,77.362 r270 top
L8 "600R@100MHz" INDC1608X95N 6.5,74.125 r270 top
L9 "1.5uH" IND_WURTH_WE-LHMI_7050 171.5,65.4 r0 top
L10 "2x250uH" IND_WURTH_WE-SL2 168.2,88.1 r180 top
L11 "120R@100MHz" INDC1608X65N 88.25,28.125 r90 top
LD1 "Green" LED_KINGBRIGHT_KP-1608CGCK 47.7,45.8 r90 top
LD2 "Green" LED_KINGBRIGHT_KP-1608CGCK 46.2,45.8 r90 top
LD3 "Green" LED_KINGBRIGHT_KP-1608CGCK 44.7,45.8 r90 top
LD4 "Green" LED_KINGBRIGHT_KP-1608CGCK 43.2,45.8 r90 top
LD5 "Green" LED_KINGBRIGHT_KP-1608CGCK 41.7,45.8 r90 top
LD6 "Green" LED_KINGBRIGHT_KP-1608CGCK 40.2,45.8 r90 top
LD7 "Green" LED_KINGBRIGHT_KP-1608CGCK 38.7,45.8 r90 top
LD8 "Green" LED_KINGBRIGHT_KP-1608CGCK 37.2,45.8 r90 top
LD9 "Red" LED_AVAGO_HSMC-C110 -4.721,13.411 r90 top
LD10 "Green" LED_KINGBRIGHT_KP-1608CGCK 182.5,71 r270 top
LD11 "Green" LED_AVAGO_HSME-C110 -4.721,7.899 r90 top
M1 "Plated Hole" MTG300_600 0,88.9 r0 top locked
M2 "Plated Hole" MTG300_600 0,0 r0 top locked
M3A "Plated Hole" MTG300_600 64.3,40.65 r0 top (schematic designator M3)
M3B "Plated Hole" MTG300_600 64.3,85.1 r0 top (schematic designator M3)
M4A "Plated Hole" MTG300_600 7.736,14.394 r0 top (schematic designator M4)
M4B "Plated Hole" MTG300_600 7.736,58.844 r0 top (schematic designator M4)
MOD1 "Optoisolator Module" OPTOISOLATOR_MODULE 111.068,40.015 r270 top locked
MOD2 "Optoisolator Module" OPTOISOLATOR_MODULE 163.968,-0.625 r90 top locked
OSC1 "25MHz" OSC_PERICOM_FRETHE025 99.85,20.925 r0 top
P1 "10k" TRIM_BOURNS_3314G-1 147.7,73.3 r90 top
R1A "68" RESC1005X40N 50.8,21.35 r0 bottom (schematic designator R1)
R1B "68" RESC1005X40N 50.8,65.8 r0 bottom (schematic designator R1)
R2A "20" RESC1005X40N 50.8,21.35 r0 top (schematic designator R2)
R2B "20" RESC1005X40N 50.8,65.8 r0 top (schematic designator R2)
R3A "20" RESC1005X40N 50.8,20.35 r0 top (schematic designator R3)
R3B "20" RESC1005X40N 50.8,64.8 r0 top (schematic designator R3)
R4A "68" RESC1005X40N 50.8,20.35 r0 bottom (schematic designator R4)
R4B "68" RESC1005X40N 50.8,64.8 r0 bottom (schematic designator R4)
R5A "100" RESC1005X40N 56.425,24.75 r0 top (schematic designator R5)
R5B "100" RESC1005X40N 56.425,69.2 r0 top (schematic designator R5)
R6A "100" RESC1005X40N 59.7,22.8 r90 top (schematic designator R6)
R6B "100" RESC1005X40N 59.7,67.25 r90 top (schematic designator R6)
R7A "300" RESC1005X40N 24.2,21.45 r0 top (schematic designator R7)
R7B "300" RESC1005X40N 24.2,65.9 r0 top (schematic designator R7)
R8A "5R6" RESC1608X55N 46.3,26.35 r0 top (schematic designator R8)
R8B "5R6" RESC1608X55N 46.3,70.8 r0 top (schematic designator R8)
R9A "25R5" RESC1005X40N 36.5,25.95 r90 top (schematic designator R9)
R9B "25R5" RESC1005X40N 36.5,70.4 r90 top (schematic designator R9)
R10A "300" RESC1005X40N 25.7,21.95 r90 top (schematic designator R10)
R10B "300" RESC1005X40N 25.7,66.4 r90 top (schematic designator R10)
R11A "499" RESC1005X40N 21.6,23.75 r90 top (schematic designator R11)
R11B "499" RESC1005X40N 21.6,68.2 r90 top (schematic designator R11)
R12A "56" RESC1005X40N 33.4,21.35 r0 top (schematic designator R12)
R12B "56" RESC1005X40N 33.4,65.8 r0 top (schematic designator R12)
R13A "56" RESC1005X40N 33.4,20.35 r0 top (schematic designator R13)
R13B "56" RESC1005X40N 33.4,64.8 r0 top (schematic designator R13)
R14A "100k" RESC1005X40N 28.6,17.65 r270 top (schematic designator R14)
R14B "100k" RESC1005X40N 28.6,62.1 r270 top (schematic designator R14)
R15A "300" RESC1005X40N 24.2,20.25 r0 top (schematic designator R15)
R15B "300" RESC1005X40N 24.2,64.7 r0 top (schematic designator R15)
R16A "5R6" RESC1608X55N 46.3,15.35 r0 top (schematic designator R16)
R16B "5R6" RESC1608X55N 46.3,59.8 r0 top (schematic designator R16)
R17A "25R5" RESC1005X40N 36.5,14.95 r90 top (schematic designator R17)
R17B "25R5" RESC1005X40N 36.5,59.4 r90 top (schematic designator R17)
R18A "300" RESC1005X40N 25.7,19.75 r270 top (schematic designator R18)
R18B "300" RESC1005X40N 25.7,64.2 r270 top (schematic designator R18)
R19A "499" RESC1005X40N 21.6,16.95 r90 top (schematic designator R19)
R19B "499" RESC1005X40N 21.6,61.4 r90 top (schematic designator R19)
R20 "100k" RESC1005X40N 95.05,19.425 r180 top
R21 "845" RESC1608X55N 91.35,17.125 r180 top
R22 "316" RESC1608X55N 91.35,21.625 r180 top
R23 "5k1" RESC1005X40N 96.43,8.425 r90 top
R24 "100" RESC1005X40N 85.2,13.225 r90 top
R25 "100" RESC1005X40N 161.3,56.73 r270 top
R26 "100" RESC1005X40N 161.3,59.27 r270 top
R27 "100" RESC1005X40N 168.1,45.43 r270 top
R28 "100" RESC1005X40N 168.1,47.97 r270 top
R29 "100" RESC1005X40N 165.4,51.03 r270 top
R30 "100k" RESC1005X40N 85.2,15.525 r270 top
R31 "1M1" RESC2012X60N 5.5,-0.4 r0 top
R32 "150k" RESC1005X40N 74.1,48.4 r180 top
R33 "1k5" RESC1005X40N 71.9,55.4 r90 top
R34 "36k" RESC1005X40N 75.868,90.075 r0 top
R35 "150k" RESC1005X40N 70.768,88.275 r90 top
R36 "10M" RESC2113X55N 66.9,-1.6 r0 top
R37 "10k" RESC1608X55N 182.6,7.6 r270 top
R38 "33k" RESC1005X40N 19.775,86.962 r180 top
R39 "100k" RESC1005X40N 17.575,84.762 r90 top
R40 "100k" RESC1005X40N 18.575,84.762 r90 top
R41 "499" RESC1005X40N 25.545,86.962 r0 top
R42 "2k2" RESC1005X40N 21.675,86.962 r180 top
R43 "33k" RESC1005X40N 42.093,87.95 r180 top
R44 "11k" RESC1005X40N 40.893,85.75 r90 top
R45 "33k" RESC1005X40N 14.38,82.225 r0 top
R46 "2k2" RESC1005X40N 14.38,81.225 r0 top
R47 "3k" RESC1005X40N 47.863,87.95 r0 top
R48 "3k" RESC1005X40N 43.993,87.95 r180 top
R49 "499" RESC1005X40N 47.7,48.3 r90 top
R50 "499" RESC1005X40N 46.2,48.3 r90 top
R51 "499" RESC1005X40N 44.7,48.3 r90 top
R52 "499" RESC1005X40N 43.2,48.3 r90 top
R53 "11k" RESC1005X40N 45.893,87.95 r180 top
R54 "10k" RESC1005X40N 48.2,35.5 r0 top
R55 "10k" RESC1005X40N 46.3,35.5 r0 top
R56 "10k" RESC1005X40N 44.4,35.5 r0 top
R57 "10k" RESC1005X40N 42.5,35.5 r0 top
R58 "499" RESC1005X40N 12.2,82.725 r0 top
R59 "100k" RESC1005X40N 6.1,80.925 r90 top
R60 "100k" RESC1005X40N 7.1,80.925 r90 top
R61 "499" RESC1005X40N 41.7,48.3 r90 top
R62 "499" RESC1005X40N 40.2,48.3 r90 top
R63 "499" RESC1005X40N 38.7,48.3 r90 top
R64 "499" RESC1005X40N 37.2,48.3 r90 top
R65 "33k" RESC1005X40N 53.043,87.975 r180 top
R66 "11k" RESC1005X40N 51.843,85.775 r90 top
R67 "10k" RESC1005X40N 40.6,35.5 r0 top
R68 "10k" RESC1005X40N 38.7,35.5 r0 top
R69 "10k" RESC1005X40N 36.8,35.5 r0 top
R70 "10k" RESC1005X40N 34.9,35.5 r0 top
R71 "33k" RESC1005X40N 31.718,85.625 r180 top
R72 "3k" RESC1005X40N 58.813,87.975 r0 top
R73 "3k" RESC1005X40N 54.943,87.975 r180 top
R74 "33k" RESC1005X40N 30.518,83.425 r90 top
R75 "11k" RESC1005X40N 56.843,87.975 r180 top
R76 "3k" RESC1005X40N 37.488,85.625 r0 top
R77 "3k" RESC1005X40N 33.618,85.625 r180 top
R78 "499" RESC1005X40N 35.518,85.625 r180 top
R79 "390" RESC1005X40N 119.782,9.638 r90 top
R80 "390" RESC1005X40N 156,40.7 r180 bottom
R81 "47" RESC1005X40N 122.382,14.238 r180 top
R82 "47" RESC1005X40N 158.5,45.5 r0 bottom
R83 "1k" RESC1005X40N 122.382,13.238 r0 top
R84 "150" RESC1005X40N 120.382,13.238 r0 top
R85 "150" RESC1005X40N 158.3,40.7 r0 bottom
R86 "1k" RESC1005X40N 156.6,45.5 r0 bottom
R87 "390" RESC1005X40N 156,5.5 r180 bottom
R88 "390" RESC1005X40N 145.5,31.2 r270 bottom
R89 "47" RESC1005X40N 158.5,10.3 r0 bottom
R90 "47" RESC1005X40N 149.5,33.9 r90 bottom
R91 "150" RESC1005X40N 158.3,5.5 r0 bottom
R92 "1k" RESC1005X40N 156.6,10.3 r0 bottom
R93 "150" RESC1005X40N 148.8,28.3 r0 bottom
R94 "1k" RESC1005X40N 151.3,31.3 r180 bottom
R95 "390" RESC1005X40N 145.5,13.6 r270 bottom
R96 "390" RESC1005X40N 156,23.1 r180 bottom
R97 "47" RESC1005X40N 149.5,16.3 r90 bottom
R98 "47" RESC1005X40N 158.5,27.9 r0 bottom
R99 "150" RESC1005X40N 148.8,10.7 r0 bottom
R100 "47" RESC1608X55N 144,85.1 r180 top
R101 "47" RESC1608X55N 160.6,84.9 r0 top
R102 "100k" RESC1005X40N 153.6,85.7 r270 bottom
R103 "47" RESC1608X55N 144,90.7 r180 top
R104 "47" RESC1608X55N 140.5,79.2 r0 top
R105 "0R5" RESC6532X80N 142.8,82.1 r180 top
R106 "2k7" RESC1608X55N 150.9,84.8 r0 bottom
R107 "47" RESC1608X55N 153.3,80.1 r270 top
R108 "1k" RESC1005X40N 152.6,76.1 r0 top
R109 "47" RESC1608X55N 159,77 r90 top
R110 "47" RESC1608X55N 149.1,77.6 r0 top
R111 "47" RESC1608X55N 159.1,82.2 r90 top
R112 "1M" RESC1608X55N 149.9,80.1 r90 top
R113 "47" RESC1608X55N 155.7,81.1 r180 top
R114 "2k7" RESC1608X55N 123.068,50.875 r90 top
R115 "2k2" RESC1005X40N 129.068,54.075 r90 top
R116 "13k7" RESC1608X55N 122.368,48.575 r180 top
R117 "47" RESC1608X55N 124.668,50.875 r90 top
R118 "2k2" RESC1005X40N 120.968,44.675 r90 top
R119 "1k" RESC1005X40N 151.3,13.7 r180 bottom
R120 "150" RESC1005X40N 158.28,23.12 r0 bottom
R121 "1k" RESC1005X40N 156.6,27.9 r0 bottom
R122 "10M" RESC2113X55N 35.9,-1.6 r180 top
R123 "10k" RESC1005X40N 99.55,25.325 r0 top
R124 "10k" RESC1005X40N 95.95,21.025 r270 top
R125 "470" RESC1005X40N 97.65,28.325 r0 top
R126 "10k" RESC1005X40N 97.65,25.325 r0 top
R127 "560k" RESC1608X55N 177.6,81.9 r180 top
R128 "49k9" RESC1608X55N 179.55,75.9 r180 top
R129 "150k" RESC1608X55N 180.7,81.9 r180 top
R130 "22" RESC1005X40N 189.4,-1.2 r0 top
R131 "22" RESC1005X40N 189.4,0.8 r0 top
R132 "1k6" RESC1005X40N -2.8,14.7 r270 top
R133 "22" RESC1005X40N 191.6,4.5 r0 top
R134 "10k" RESC1608X55N 184.3,11.3 r270 top
R135 "0" RESC1005X40N 184.6,13.8 r270 top
R136 "22" RESC1005X40N 189.4,-0.2 r0 top
R137 "0" RESC1005X40N 187.3,16.9 r180 top
R138 "22" RESC1005X40N 193.6,4.5 r0 top
R139 "499" RESC1005X40N 181.8,68.5 r180 top
R140 "10k" RESC1005X40N 179.9,68.5 r0 top
R141 "1k" RESC1005X40N -2.8,9.2 r270 top
R142 "100" RESC1005X40N 90.65,25.625 r270 top
R143 "0" RESC1005X40N 179.529,30.112 r0 bottom
R144 "0" RESC1005X40N 179.541,29.147 r0 bottom
R145 "0" RESC1005X40N 198.299,55.893 r180 bottom
R146 "0" RESC1005X40N 198.49,52.642 r180 bottom
R147 "0" RESC1005X40N 198.617,48.324 r180 bottom
R148 "0" RESC1005X40N 198.693,42.151 r180 bottom
R149 "0" RESC1005X40N 198.744,40.196 r180 bottom
R150 "0" RESC1005X40N 198.871,35.928 r180 bottom
R151 "0" RESC1005X40N 198.921,32.83 r180 bottom
R152 "0" RESC1005X40N 198.744,29.172 r180 bottom
R153 "22" RESC1005X40N 167.6,4.4 r90 top
R154 "200" RESC1005X40N 167.6,2.5 r90 top
R155 "10k" RESC1608X55N 166.3,3.1 r90 top
R156 "0" RESC1005X40N 179.478,41.821 r180 bottom
R157 "0" RESC1005X40N 179.49,40.17 r180 bottom
R158 "0" RESC1005X40N 179.49,34.709 r180 bottom
R159 "0" RESC1005X40N 179.57,32.7 r180 bottom
R160 "10k" RESC1608X55N 179.4,7.6 r90 top
R161 "0" RESC1005X40N 198.363,54.928 r180 bottom
R162 "0" RESC1005X40N 198.49,51.626 r180 bottom
R163 "0" RESC1005X40N 198.642,47.384 r180 bottom
R164 "0" RESC1005X40N 198.693,43.071 r180 bottom
R165 "10k" RESC1608X55N 176.2,7.6 r270 top
R166 "10k" RESC1608X55N 181,7.6 r270 top
R167 "0" RESC1005X40N 198.744,39.256 r180 bottom
R168 "0" RESC1005X40N 198.871,36.868 r180 bottom
R169 "0" RESC1005X40N 198.921,31.9 r180 bottom
R170 "0" RESC1005X40N 198.744,28.232 r180 bottom
R171 "0" RESC1005X40N 179.516,54.928 r180 bottom
R172 "0" RESC1005X40N 179.49,50.965 r180 bottom
R173 "0" RESC1005X40N 179.389,46.8 r180 bottom
R174 "0" RESC1005X40N 179.478,42.761 r180 bottom
R175 "0" RESC1005X40N 179.49,39.256 r180 bottom
R176 "0" RESC1005X40N 179.49,35.624 r180 bottom
R177 "0" RESC1005X40N 179.57,31.8 r180 bottom
R178 "10k" RESC1608X55N 177.8,7.6 r270 top
R179 "2k7" RESC1608X55N 182.8,4.1 r90 top
R180 "10k" RESC1608X55N 182.8,-0.1 r270 top
R181 "0" RESC1005X40N 168.8,2.6 r90 top
R182 "0" RESC1005X40N 168.8,5.3 r270 top
R183 "2k7" RESC1608X55N 184.3,7.6 r90 top
R184 "10k" RESC1608X55N 187.9,7.6 r90 top
R185 "10k" RESC1608X55N 173.3,11.7 r0 top
R186 "0" RESC1005X40N 189.3,3.1 r180 bottom
R187 "0" RESC1005X40N 189.3,2.1 r180 bottom
R188 "0" RESC1005X40N 179.516,55.867 r180 bottom
R189 "0" RESC1005X40N 179.49,50.025 r180 bottom
R190 "0" RESC1005X40N 179.376,47.719 r180 bottom
R191 "10k" RESC1005X40N 175.7,86.3 r180 bottom
R192 "2M" RESC1005X40N 175.7,87.5 r0 bottom
R193 "10k" RESC1005X40N 175.3,84.8 r270 bottom
R194 "36k" RESC1005X40N 71.9,48.6 r90 top
R195 "11k" RESC1005X40N 71.9,50.5 r90 top
R196 "1k" RESC1005X40N 71.9,52.4 r270 top
R197 "11k" RESC1005X40N 78.048,90.575 r180 top
R198 "36k" RESC1005X40N 78.048,89.575 r0 top
R199 "1k" RESC1005X40N 78.048,88.575 r0 top
R257 "0" RESC1005X40N 191.12,7.5 r180 bottom
R260 "0" RESC1005X40N 191.12,8.5 r180 bottom
R261 "0" RESC1005X40N 191.12,5.5 r180 bottom
R262 "0" RESC1005X40N 191.12,6.5 r180 bottom
SW1 "Switch" JUMPSMD0805_G50 144.7,82.1 r180 bottom
T1 "BSS138LT1G" SOT95P240X110-3N 170,8 r180 top
T2 "BSS138LT1G" SOT95P240X110-3N 167.4,-0.5 r90 top
T3 "BSS138LT1G" SOT95P240X110-3N 47.4,41.5 r0 top
T4 "BSS138LT1G" SOT95P240X110-3N 47.4,37.9 r0 top
T5 "BSS138LT1G" SOT95P240X110-3N 43.5,41.5 r0 top
T6 "BSS138LT1G" SOT95P240X110-3N 43.5,37.9 r0 top
T7 "FDS9926A" SOIC127P600X175-8N 136.9,88.2 r180 top
T8 "BSS138LT1G" SOT95P240X110-3N 39.6,41.5 r0 top
T9 "BSS138LT1G" SOT95P240X110-3N 39.6,37.9 r0 top
T10 "BSS138LT1G" SOT95P240X110-3N 35.7,41.5 r0 top
T11 "BSS138LT1G" SOT95P240X110-3N 35.7,37.9 r0 top
T12 "BSS138LT1G" SOT95P240X110-3N 122.082,10.738 r270 top
T13 "BSS138LT1G" SOT95P240X110-3N 157.62,43.08 r180 bottom
T14 "BSS138LT1G" SOT95P240X110-3N 157.6,7.9 r180 bottom
T15 "BSS138LT1G" SOT95P240X110-3N 148.1,30.8 r180 bottom
T16 "BSS138LT1G" SOT95P240X110-3N 148.1,13.2 r180 bottom
T17 "BSS138LT1G" SOT95P240X110-3N 157.62,25.48 r180 bottom
T18 "BSS138LT1G" SOT95P240X110-3N 179.7,71 r0 top
T19 "BSS138LT1G" SOT95P240X110-3N 185.9,4.3 r180 top
T20 "BSS138LT1G" SOT95P240X110-3N 185.9,0.8 r180 top
T21 "SI4425DDY-T1-GE3" SOIC127P600X175-8N 178.6,87.7 r270 top
T22 "BC847B" SOT95P230X110-3N 172.9,86 r90 bottom
Tr1 "RTNC-40X25X15(M-083)" RTNC-40X25X15(M-083) 115.068,71.375 r225 top locked